# EAGLE board SparkFun_Qwiic_6DoF_BMI270-Panel (EAGLE 9.6.2), part 1 of 4
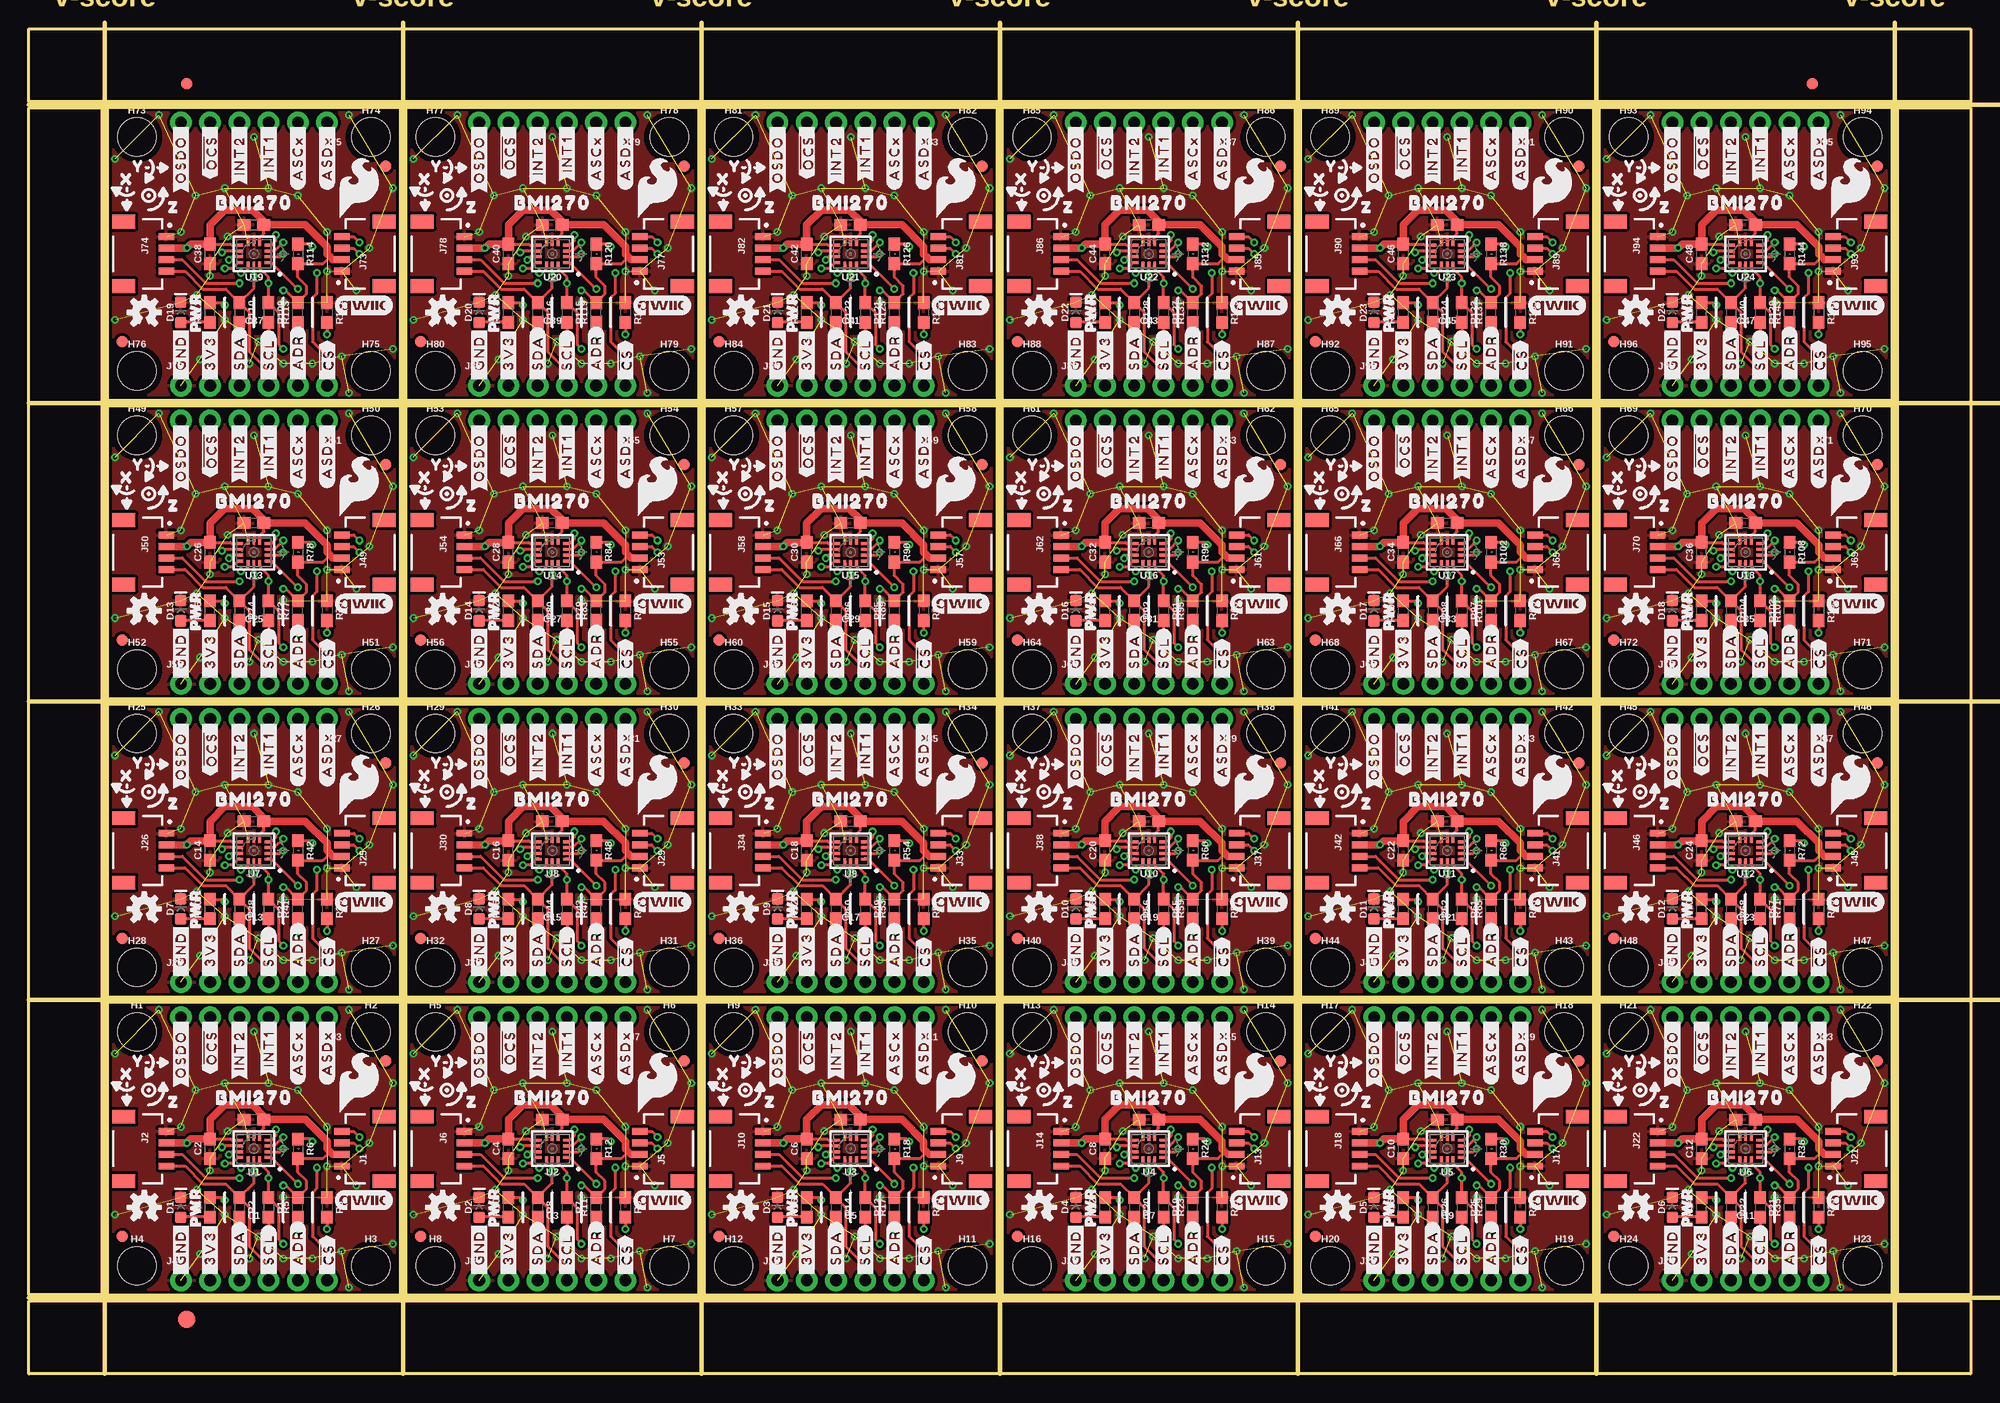
[diagram p0: board, top side]
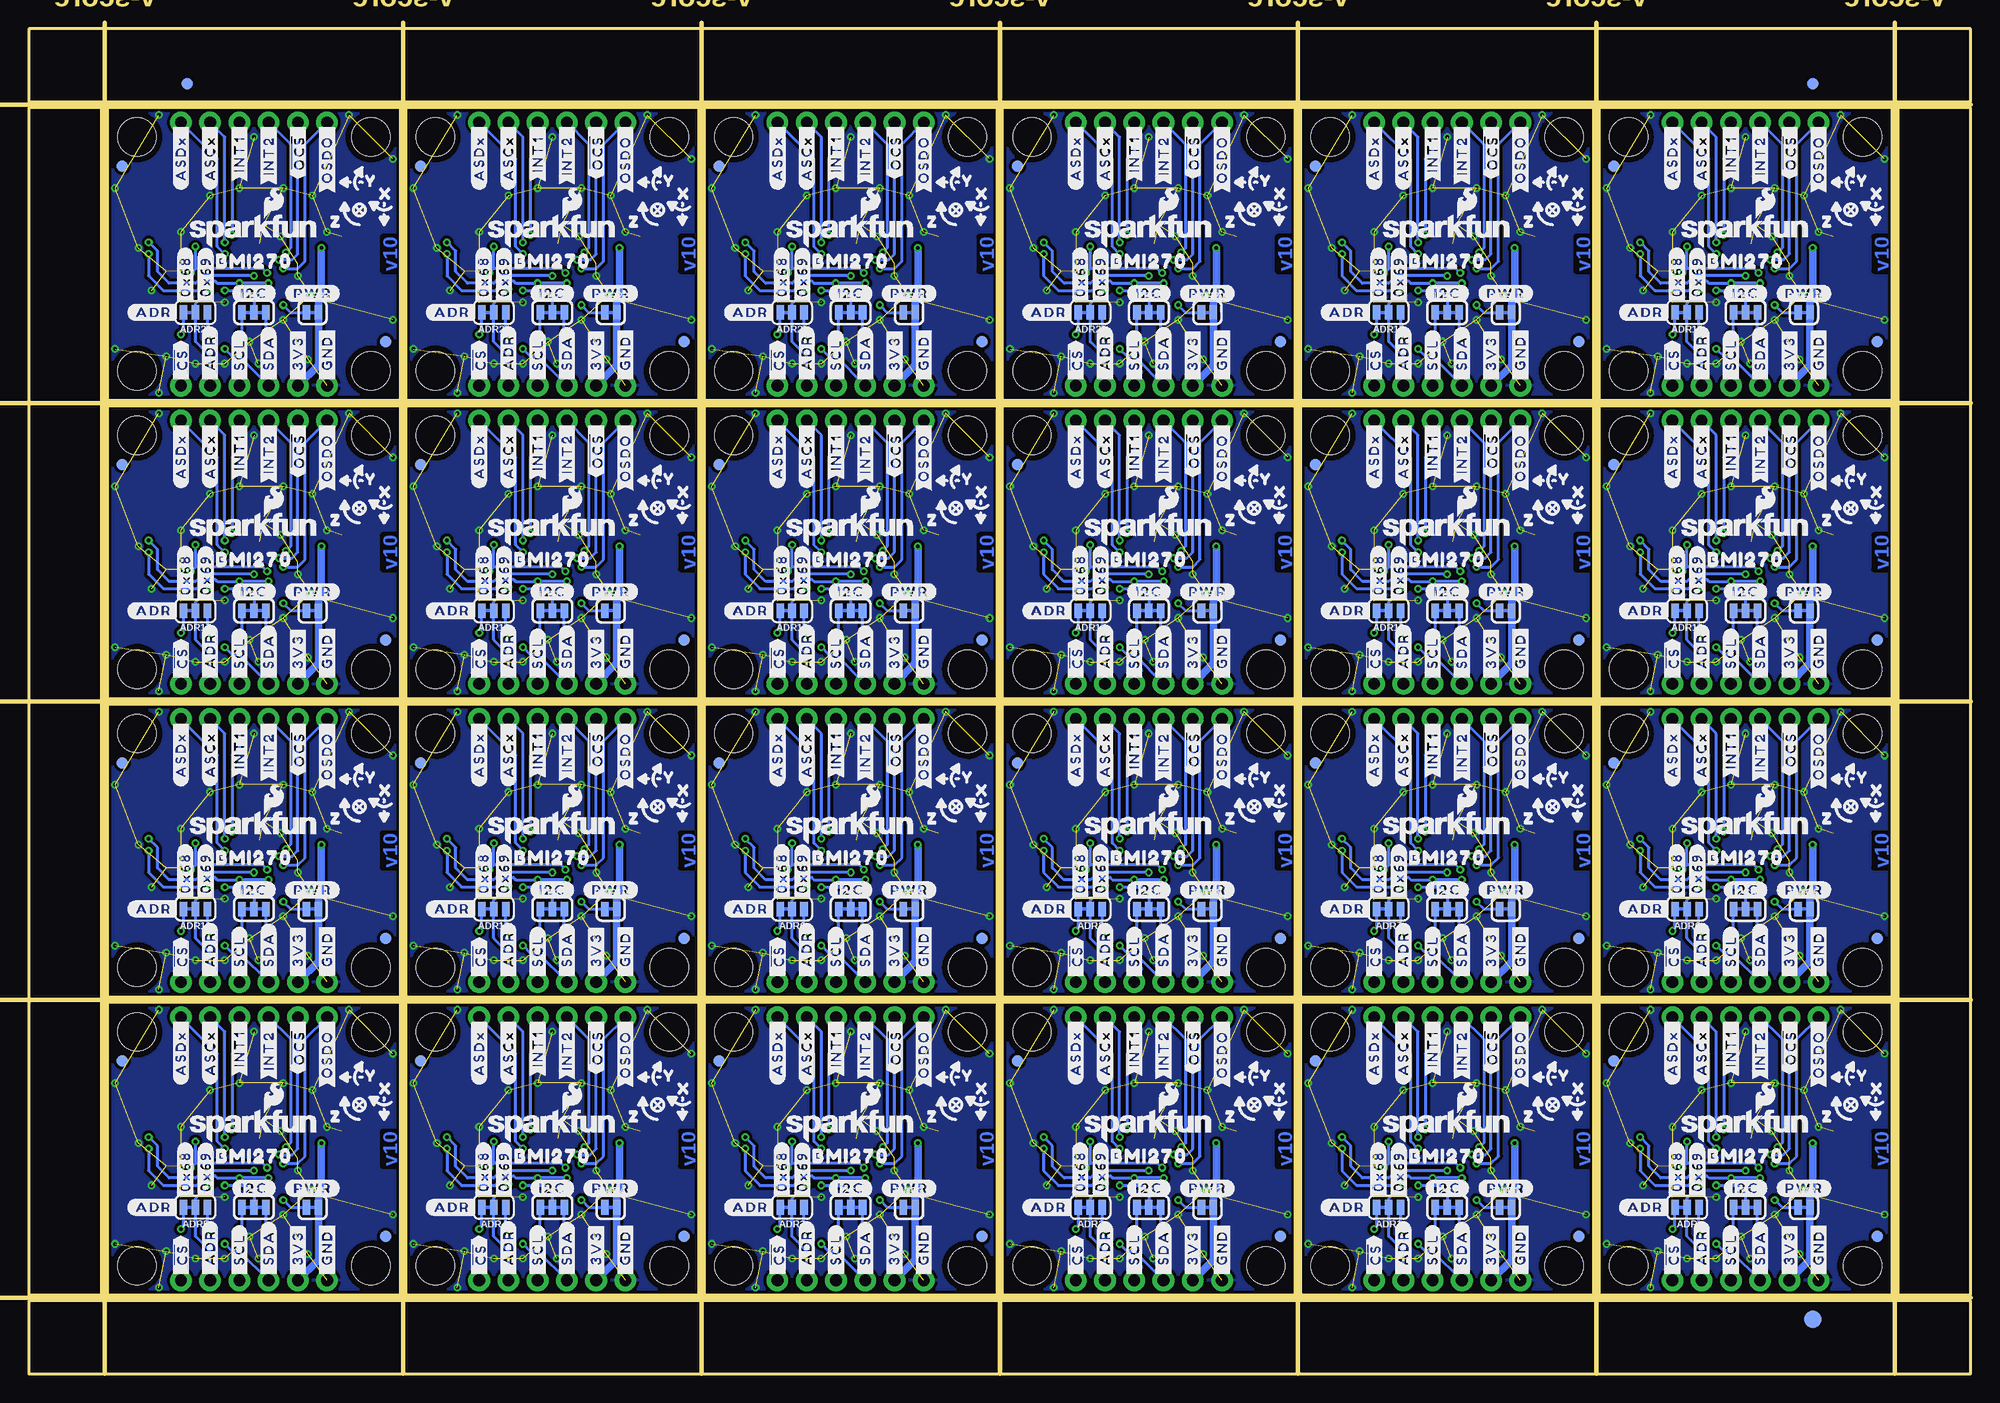
[diagram p1: board, bottom side, seen from below]

Size 168.66 x 116.84 mm. Coordinates in mm from the lower left corner, seen from the top.
Outline: 6.86,6.86 32.26,6.86 32.26,32.26 6.86,32.26 6.86,6.86
Outline: 32.77,6.86 58.17,6.86 58.17,32.26 32.77,32.26 32.77,6.86
Outline: 58.67,6.86 84.07,6.86 84.07,32.26 58.67,32.26 58.67,6.86
Outline: 84.58,6.86 109.98,6.86 109.98,32.26 84.58,32.26 84.58,6.86
Outline: 110.49,6.86 135.89,6.86 135.89,32.26 110.49,32.26 110.49,6.86
Outline: 136.4,6.86 161.8,6.86 161.8,32.26 136.4,32.26 136.4,6.86
Outline: 6.86,32.77 32.26,32.77 32.26,58.17 6.86,58.17 6.86,32.77
Outline: 32.77,32.77 58.17,32.77 58.17,58.17 32.77,58.17 32.77,32.77
Outline: 58.67,32.77 84.07,32.77 84.07,58.17 58.67,58.17 58.67,32.77
Outline: 84.58,32.77 109.98,32.77 109.98,58.17 84.58,58.17 84.58,32.77
Outline: 110.49,32.77 135.89,32.77 135.89,58.17 110.49,58.17 110.49,32.77
Outline: 136.4,32.77 161.8,32.77 161.8,58.17 136.4,58.17 136.4,32.77
Outline: 6.86,58.67 32.26,58.67 32.26,84.07 6.86,84.07 6.86,58.67
Outline: 32.77,58.67 58.17,58.67 58.17,84.07 32.77,84.07 32.77,58.67
Outline: 58.67,58.67 84.07,58.67 84.07,84.07 58.67,84.07 58.67,58.67
Outline: 84.58,58.67 109.98,58.67 109.98,84.07 84.58,84.07 84.58,58.67
Outline: 110.49,58.67 135.89,58.67 135.89,84.07 110.49,84.07 110.49,58.67
Outline: 136.4,58.67 161.8,58.67 161.8,84.07 136.4,84.07 136.4,58.67
Outline: 6.86,84.58 32.26,84.58 32.26,109.98 6.86,109.98 6.86,84.58
Outline: 32.77,84.58 58.17,84.58 58.17,109.98 32.77,109.98 32.77,84.58
Outline: 58.67,84.58 84.07,84.58 84.07,109.98 58.67,109.98 58.67,84.58
Outline: 84.58,84.58 109.98,84.58 109.98,109.98 84.58,109.98 84.58,84.58
Outline: 110.49,84.58 135.89,84.58 135.89,109.98 110.49,109.98 110.49,84.58
Outline: 136.4,84.58 161.8,84.58 161.8,109.98 136.4,109.98 136.4,84.58
Outline: 0,6.35 168.66,6.35 168.66,0 0,0 0,6.35
Outline: 162.31,109.98 168.66,109.98 168.66,6.86 162.31,6.86 162.31,109.98
Outline: 0,116.84 168.66,116.84 168.66,110.49 0,110.49 0,116.84
Outline: 0,109.98 6.35,109.98 6.35,6.86 0,6.86 0,109.98
Copper layers (1*16): Top 0.035mm / dielectric 1.5mm / Bottom 0.035mm
Design rules "SparkFun_Qwiic_6DoF_BMI270": minimum track width 7mil, minimum drill 0.3mm, track to track 7mil, track to pad 7mil, pad to pad 7mil, via to via 7mil, smd to smd 7mil, copper to edge 7mil, drill to drill 7mil, minimum pad ring 7mil, minimum via ring 7mil, stop-mask expansion 3mil, vias tented up to drill 25mil, thermal gap 10mil
tRestrict: area 19.2,20.3 to 19.4,20.6; area 19.7,12.8 to 20.1,13.1; area 45.1,20.3 to 45.3,20.6; area 45.6,12.8 to 46,13.1; area 71.1,20.3 to 71.2,20.6; area 71.5,12.8 to 71.9,13.1; area 97,20.3 to 97.1,20.6; area 97.4,12.8 to 97.8,13.1; area 122.9,20.3 to 123,20.6; area 123.3,12.8 to 123.7,13.1; area 148.8,20.3 to 148.9,20.6; area 149.2,12.8 to 149.6,13.1; area 19.2,46.2 to 19.4,46.5; area 19.7,38.7 to 20.1,39; area 45.1,46.2 to 45.3,46.5; area 45.6,38.7 to 46,39; area 71.1,46.2 to 71.2,46.5; area 71.5,38.7 to 71.9,39; area 97,46.2 to 97.1,46.5; area 97.4,38.7 to 97.8,39; area 122.9,46.2 to 123,46.5; area 123.3,38.7 to 123.7,39; area 148.8,46.2 to 148.9,46.5; area 149.2,38.7 to 149.6,39; area 19.2,72.1 to 19.4,72.4; area 19.7,64.6 to 20.1,64.9; area 45.1,72.1 to 45.3,72.4; area 45.6,64.6 to 46,64.9; area 71.1,72.1 to 71.2,72.4; area 71.5,64.6 to 71.9,64.9; area 97,72.1 to 97.1,72.4; area 97.4,64.6 to 97.8,64.9; area 122.9,72.1 to 123,72.4; area 123.3,64.6 to 123.7,64.9; area 148.8,72.1 to 148.9,72.4; area 149.2,64.6 to 149.6,64.9; area 19.2,98 to 19.4,98.3; area 19.7,90.6 to 20.1,90.8; area 45.1,98 to 45.3,98.3; area 45.6,90.6 to 46,90.8; area 71.1,98 to 71.2,98.3; area 71.5,90.6 to 71.9,90.8; area 97,98 to 97.1,98.3; area 97.4,90.6 to 97.8,90.8; area 122.9,98 to 123,98.3; area 123.3,90.6 to 123.7,90.8; area 148.8,98 to 148.9,98.3; area 149.2,90.6 to 149.6,90.8
Milling: 12 lines

## Footprints (pad centres in the part's own frame; a part is rotated, then mirrored left to right if it is on the bottom)
SMT-JUMPER_3_1-NC_TRACE_SILK = smd 0.66 x 1.27: 1 -1.041,0; 2 0,0; 3 1.041,0
0603 = smd 1.1 x 1: 1 -0.85,0; 2 0.85,0
LED-0603 = smd 1 x 1: A -0.877,0; C 0.877,0
FIDUCIAL-1X2 = smd 1 x 1: 1 0,0
FIDUCIAL-1.5X3 = smd 1.5 x 1.5: 1 0,0
STAND-OFF = hole 3.302: 0,0
SMT-JUMPER_3_2-NC_TRACE_SILK = smd 0.66 x 1.27: 1 -1.041,0; 2 0,0; 3 1.041,0
JST04_1MM_RA = smd 0.6 x 1.35: 1 -1.5,0; 2 -0.5,0; 3 0.5,0; 4 1.5,0 | smd 1.2 x 2: NC1 2.8,-3.675; NC2 -2.8,-3.675
1X06_NO_SILK = drill 1.016 pad 1.88: 1 0,0; 2 2.54,0; 3 5.08,0; 4 7.62,0; 5 10.16,0; 6 12.7,0
SMT-JUMPER_2_NC_TRACE_SILK = smd 0.66 x 1.27: 1 -0.521,0; 2 0.521,0
BMI270 = smd 0.475 x 0.25: 1 -1.163,0.75; 2 -1.163,0.25; 3 -1.163,-0.25; 4 -1.163,-0.75; 8 1.163,-0.75; 9 1.163,-0.25; 10 1.163,0.25; 11 1.163,0.75 | smd 0.25 x 0.475: 5 -0.5,-0.912; 6 0,-0.912; 7 0.5,-0.912; 12 0.5,0.912; 13 0,0.912; 14 -0.5,0.912

## Placement (x,y rotation side)
ADR  JUMPER-SMT_3_1-NC_TRACE_SILK  [SMT-JUMPER_3_1-NC_TRACE_SILK]  24.64,14.48 180 bottom
ADR1  JUMPER-SMT_3_1-NC_TRACE_SILK  [SMT-JUMPER_3_1-NC_TRACE_SILK]  50.55,14.48 180 bottom
ADR2  JUMPER-SMT_3_1-NC_TRACE_SILK  [SMT-JUMPER_3_1-NC_TRACE_SILK]  76.45,14.48 180 bottom
ADR3  JUMPER-SMT_3_1-NC_TRACE_SILK  [SMT-JUMPER_3_1-NC_TRACE_SILK]  102.36,14.48 180 bottom
ADR4  JUMPER-SMT_3_1-NC_TRACE_SILK  [SMT-JUMPER_3_1-NC_TRACE_SILK]  128.27,14.48 180 bottom
ADR5  JUMPER-SMT_3_1-NC_TRACE_SILK  [SMT-JUMPER_3_1-NC_TRACE_SILK]  154.18,14.48 180 bottom
ADR6  JUMPER-SMT_3_1-NC_TRACE_SILK  [SMT-JUMPER_3_1-NC_TRACE_SILK]  24.64,40.39 180 bottom
ADR7  JUMPER-SMT_3_1-NC_TRACE_SILK  [SMT-JUMPER_3_1-NC_TRACE_SILK]  50.55,40.39 180 bottom
ADR8  JUMPER-SMT_3_1-NC_TRACE_SILK  [SMT-JUMPER_3_1-NC_TRACE_SILK]  76.45,40.39 180 bottom
ADR9  JUMPER-SMT_3_1-NC_TRACE_SILK  [SMT-JUMPER_3_1-NC_TRACE_SILK]  102.36,40.39 180 bottom
ADR10  JUMPER-SMT_3_1-NC_TRACE_SILK  [SMT-JUMPER_3_1-NC_TRACE_SILK]  128.27,40.39 180 bottom
ADR11  JUMPER-SMT_3_1-NC_TRACE_SILK  [SMT-JUMPER_3_1-NC_TRACE_SILK]  154.18,40.39 180 bottom
ADR12  JUMPER-SMT_3_1-NC_TRACE_SILK  [SMT-JUMPER_3_1-NC_TRACE_SILK]  24.64,66.29 180 bottom
ADR13  JUMPER-SMT_3_1-NC_TRACE_SILK  [SMT-JUMPER_3_1-NC_TRACE_SILK]  50.55,66.29 180 bottom
ADR14  JUMPER-SMT_3_1-NC_TRACE_SILK  [SMT-JUMPER_3_1-NC_TRACE_SILK]  76.45,66.29 180 bottom
ADR15  JUMPER-SMT_3_1-NC_TRACE_SILK  [SMT-JUMPER_3_1-NC_TRACE_SILK]  102.36,66.29 180 bottom
ADR16  JUMPER-SMT_3_1-NC_TRACE_SILK  [SMT-JUMPER_3_1-NC_TRACE_SILK]  128.27,66.29 180 bottom
ADR17  JUMPER-SMT_3_1-NC_TRACE_SILK  [SMT-JUMPER_3_1-NC_TRACE_SILK]  154.18,66.29 180 bottom
ADR18  JUMPER-SMT_3_1-NC_TRACE_SILK  [SMT-JUMPER_3_1-NC_TRACE_SILK]  24.64,92.2 180 bottom
ADR19  JUMPER-SMT_3_1-NC_TRACE_SILK  [SMT-JUMPER_3_1-NC_TRACE_SILK]  50.55,92.2 180 bottom
ADR20  JUMPER-SMT_3_1-NC_TRACE_SILK  [SMT-JUMPER_3_1-NC_TRACE_SILK]  76.45,92.2 180 bottom
ADR21  JUMPER-SMT_3_1-NC_TRACE_SILK  [SMT-JUMPER_3_1-NC_TRACE_SILK]  102.36,92.2 180 bottom
ADR22  JUMPER-SMT_3_1-NC_TRACE_SILK  [SMT-JUMPER_3_1-NC_TRACE_SILK]  128.27,92.2 180 bottom
ADR23  JUMPER-SMT_3_1-NC_TRACE_SILK  [SMT-JUMPER_3_1-NC_TRACE_SILK]  154.18,92.2 180 bottom
C1  0.1uF  [0603]  19.56,22.1 0 top
C2  0.1uF  [0603]  15.75,19.56 90 top
C3  0.1uF  [0603]  45.47,22.1 0 top
C4  0.1uF  [0603]  41.66,19.56 90 top
C5  0.1uF  [0603]  71.37,22.1 0 top
C6  0.1uF  [0603]  67.56,19.56 90 top
C7  0.1uF  [0603]  97.28,22.1 0 top
C8  0.1uF  [0603]  93.47,19.56 90 top
C9  0.1uF  [0603]  123.19,22.1 0 top
C10  0.1uF  [0603]  119.38,19.56 90 top
C11  0.1uF  [0603]  149.1,22.1 0 top
C12  0.1uF  [0603]  145.29,19.56 90 top
C13  0.1uF  [0603]  19.56,48.01 0 top
C14  0.1uF  [0603]  15.75,45.47 90 top
C15  0.1uF  [0603]  45.47,48.01 0 top
C16  0.1uF  [0603]  41.66,45.47 90 top
C17  0.1uF  [0603]  71.37,48.01 0 top
C18  0.1uF  [0603]  67.56,45.47 90 top
C19  0.1uF  [0603]  97.28,48.01 0 top
C20  0.1uF  [0603]  93.47,45.47 90 top
C21  0.1uF  [0603]  123.19,48.01 0 top
C22  0.1uF  [0603]  119.38,45.47 90 top
C23  0.1uF  [0603]  149.1,48.01 0 top
C24  0.1uF  [0603]  145.29,45.47 90 top
C25  0.1uF  [0603]  19.56,73.91 0 top
C26  0.1uF  [0603]  15.75,71.37 90 top
C27  0.1uF  [0603]  45.47,73.91 0 top
C28  0.1uF  [0603]  41.66,71.37 90 top
C29  0.1uF  [0603]  71.37,73.91 0 top
C30  0.1uF  [0603]  67.56,71.37 90 top
C31  0.1uF  [0603]  97.28,73.91 0 top
C32  0.1uF  [0603]  93.47,71.37 90 top
C33  0.1uF  [0603]  123.19,73.91 0 top
C34  0.1uF  [0603]  119.38,71.37 90 top
C35  0.1uF  [0603]  149.1,73.91 0 top
C36  0.1uF  [0603]  145.29,71.37 90 top
C37  0.1uF  [0603]  19.56,99.82 0 top
C38  0.1uF  [0603]  15.75,97.28 90 top
C39  0.1uF  [0603]  45.47,99.82 0 top
C40  0.1uF  [0603]  41.66,97.28 90 top
C41  0.1uF  [0603]  71.37,99.82 0 top
C42  0.1uF  [0603]  67.56,97.28 90 top
C43  0.1uF  [0603]  97.28,99.82 0 top
C44  0.1uF  [0603]  93.47,97.28 90 top
C45  0.1uF  [0603]  123.19,99.82 0 top
C46  0.1uF  [0603]  119.38,97.28 90 top
C47  0.1uF  [0603]  149.1,99.82 0 top
C48  0.1uF  [0603]  145.29,97.28 90 top
D1  RED  [LED-0603]  13.21,14.48 90 top
D2  RED  [LED-0603]  39.12,14.48 90 top
D3  RED  [LED-0603]  65.02,14.48 90 top
D4  RED  [LED-0603]  90.93,14.48 90 top
D5  RED  [LED-0603]  116.84,14.48 90 top
D6  RED  [LED-0603]  142.75,14.48 90 top
D7  RED  [LED-0603]  13.21,40.39 90 top
D8  RED  [LED-0603]  39.12,40.39 90 top
D9  RED  [LED-0603]  65.02,40.39 90 top
D10  RED  [LED-0603]  90.93,40.39 90 top
D11  RED  [LED-0603]  116.84,40.39 90 top
D12  RED  [LED-0603]  142.75,40.39 90 top
D13  RED  [LED-0603]  13.21,66.29 90 top
D14  RED  [LED-0603]  39.12,66.29 90 top
D15  RED  [LED-0603]  65.02,66.29 90 top
D16  RED  [LED-0603]  90.93,66.29 90 top
D17  RED  [LED-0603]  116.84,66.29 90 top
D18  RED  [LED-0603]  142.75,66.29 90 top
D19  RED  [LED-0603]  13.21,92.2 90 top
D20  RED  [LED-0603]  39.12,92.2 90 top
D21  RED  [LED-0603]  65.02,92.2 90 top
D22  RED  [LED-0603]  90.93,92.2 90 top
D23  RED  [LED-0603]  116.84,92.2 90 top
D24  RED  [LED-0603]  142.75,92.2 90 top
E$1  [FIDUCIAL-1X2]  13.72,112.08 0 top
E$2  [FIDUCIAL-1X2]  13.72,112.08 0 bottom
E$3  [FIDUCIAL-1X2]  154.88,112.08 0 top
E$4  [FIDUCIAL-1X2]  154.88,112.08 0 bottom
E$5  [FIDUCIAL-1.5X3]  13.72,4.76 0 top
E$6  [FIDUCIAL-1.5X3]  13.72,4.76 0 bottom
FD1  FIDUCIAL1X2  [FIDUCIAL-1X2]  8.13,11.94 0 top
FD2  FIDUCIAL1X2  [FIDUCIAL-1X2]  30.99,27.18 0 top
FD3  FIDUCIAL1X2  [FIDUCIAL-1X2]  30.99,27.18 0 bottom
FD4  FIDUCIAL1X2  [FIDUCIAL-1X2]  8.13,11.94 0 bottom
FD5  FIDUCIAL1X2  [FIDUCIAL-1X2]  34.04,11.94 0 top
FD6  FIDUCIAL1X2  [FIDUCIAL-1X2]  56.9,27.18 0 top
FD7  FIDUCIAL1X2  [FIDUCIAL-1X2]  56.9,27.18 0 bottom
FD8  FIDUCIAL1X2  [FIDUCIAL-1X2]  34.04,11.94 0 bottom
FD9  FIDUCIAL1X2  [FIDUCIAL-1X2]  59.94,11.94 0 top
FD10  FIDUCIAL1X2  [FIDUCIAL-1X2]  82.8,27.18 0 top
FD11  FIDUCIAL1X2  [FIDUCIAL-1X2]  82.8,27.18 0 bottom
FD12  FIDUCIAL1X2  [FIDUCIAL-1X2]  59.94,11.94 0 bottom
FD13  FIDUCIAL1X2  [FIDUCIAL-1X2]  85.85,11.94 0 top
FD14  FIDUCIAL1X2  [FIDUCIAL-1X2]  108.71,27.18 0 top
FD15  FIDUCIAL1X2  [FIDUCIAL-1X2]  108.71,27.18 0 bottom
FD16  FIDUCIAL1X2  [FIDUCIAL-1X2]  85.85,11.94 0 bottom
FD17  FIDUCIAL1X2  [FIDUCIAL-1X2]  111.76,11.94 0 top
FD18  FIDUCIAL1X2  [FIDUCIAL-1X2]  134.62,27.18 0 top
FD19  FIDUCIAL1X2  [FIDUCIAL-1X2]  134.62,27.18 0 bottom
FD20  FIDUCIAL1X2  [FIDUCIAL-1X2]  111.76,11.94 0 bottom
FD21  FIDUCIAL1X2  [FIDUCIAL-1X2]  137.67,11.94 0 top
FD22  FIDUCIAL1X2  [FIDUCIAL-1X2]  160.53,27.18 0 top
FD23  FIDUCIAL1X2  [FIDUCIAL-1X2]  160.53,27.18 0 bottom
FD24  FIDUCIAL1X2  [FIDUCIAL-1X2]  137.67,11.94 0 bottom
FD25  FIDUCIAL1X2  [FIDUCIAL-1X2]  8.13,37.85 0 top
FD26  FIDUCIAL1X2  [FIDUCIAL-1X2]  30.99,53.09 0 top
FD27  FIDUCIAL1X2  [FIDUCIAL-1X2]  30.99,53.09 0 bottom
FD28  FIDUCIAL1X2  [FIDUCIAL-1X2]  8.13,37.85 0 bottom
FD29  FIDUCIAL1X2  [FIDUCIAL-1X2]  34.04,37.85 0 top
FD30  FIDUCIAL1X2  [FIDUCIAL-1X2]  56.9,53.09 0 top
FD31  FIDUCIAL1X2  [FIDUCIAL-1X2]  56.9,53.09 0 bottom
FD32  FIDUCIAL1X2  [FIDUCIAL-1X2]  34.04,37.85 0 bottom
FD33  FIDUCIAL1X2  [FIDUCIAL-1X2]  59.94,37.85 0 top
FD34  FIDUCIAL1X2  [FIDUCIAL-1X2]  82.8,53.09 0 top
FD35  FIDUCIAL1X2  [FIDUCIAL-1X2]  82.8,53.09 0 bottom
FD36  FIDUCIAL1X2  [FIDUCIAL-1X2]  59.94,37.85 0 bottom
FD37  FIDUCIAL1X2  [FIDUCIAL-1X2]  85.85,37.85 0 top
FD38  FIDUCIAL1X2  [FIDUCIAL-1X2]  108.71,53.09 0 top
FD39  FIDUCIAL1X2  [FIDUCIAL-1X2]  108.71,53.09 0 bottom
FD40  FIDUCIAL1X2  [FIDUCIAL-1X2]  85.85,37.85 0 bottom
FD41  FIDUCIAL1X2  [FIDUCIAL-1X2]  111.76,37.85 0 top
FD42  FIDUCIAL1X2  [FIDUCIAL-1X2]  134.62,53.09 0 top
FD43  FIDUCIAL1X2  [FIDUCIAL-1X2]  134.62,53.09 0 bottom
FD44  FIDUCIAL1X2  [FIDUCIAL-1X2]  111.76,37.85 0 bottom
FD45  FIDUCIAL1X2  [FIDUCIAL-1X2]  137.67,37.85 0 top
FD46  FIDUCIAL1X2  [FIDUCIAL-1X2]  160.53,53.09 0 top
FD47  FIDUCIAL1X2  [FIDUCIAL-1X2]  160.53,53.09 0 bottom
FD48  FIDUCIAL1X2  [FIDUCIAL-1X2]  137.67,37.85 0 bottom
FD49  FIDUCIAL1X2  [FIDUCIAL-1X2]  8.13,63.75 0 top
FD50  FIDUCIAL1X2  [FIDUCIAL-1X2]  30.99,78.99 0 top
FD51  FIDUCIAL1X2  [FIDUCIAL-1X2]  30.99,78.99 0 bottom
FD52  FIDUCIAL1X2  [FIDUCIAL-1X2]  8.13,63.75 0 bottom
FD53  FIDUCIAL1X2  [FIDUCIAL-1X2]  34.04,63.75 0 top
FD54  FIDUCIAL1X2  [FIDUCIAL-1X2]  56.9,78.99 0 top
FD55  FIDUCIAL1X2  [FIDUCIAL-1X2]  56.9,78.99 0 bottom
FD56  FIDUCIAL1X2  [FIDUCIAL-1X2]  34.04,63.75 0 bottom
FD57  FIDUCIAL1X2  [FIDUCIAL-1X2]  59.94,63.75 0 top
FD58  FIDUCIAL1X2  [FIDUCIAL-1X2]  82.8,78.99 0 top
FD59  FIDUCIAL1X2  [FIDUCIAL-1X2]  82.8,78.99 0 bottom
FD60  FIDUCIAL1X2  [FIDUCIAL-1X2]  59.94,63.75 0 bottom
FD61  FIDUCIAL1X2  [FIDUCIAL-1X2]  85.85,63.75 0 top
FD62  FIDUCIAL1X2  [FIDUCIAL-1X2]  108.71,78.99 0 top
FD63  FIDUCIAL1X2  [FIDUCIAL-1X2]  108.71,78.99 0 bottom
FD64  FIDUCIAL1X2  [FIDUCIAL-1X2]  85.85,63.75 0 bottom
FD65  FIDUCIAL1X2  [FIDUCIAL-1X2]  111.76,63.75 0 top
FD66  FIDUCIAL1X2  [FIDUCIAL-1X2]  134.62,78.99 0 top
FD67  FIDUCIAL1X2  [FIDUCIAL-1X2]  134.62,78.99 0 bottom
FD68  FIDUCIAL1X2  [FIDUCIAL-1X2]  111.76,63.75 0 bottom
FD69  FIDUCIAL1X2  [FIDUCIAL-1X2]  137.67,63.75 0 top
FD70  FIDUCIAL1X2  [FIDUCIAL-1X2]  160.53,78.99 0 top
FD71  FIDUCIAL1X2  [FIDUCIAL-1X2]  160.53,78.99 0 bottom
FD72  FIDUCIAL1X2  [FIDUCIAL-1X2]  137.67,63.75 0 bottom
FD73  FIDUCIAL1X2  [FIDUCIAL-1X2]  8.13,89.66 0 top
FD74  FIDUCIAL1X2  [FIDUCIAL-1X2]  30.99,104.9 0 top
FD75  FIDUCIAL1X2  [FIDUCIAL-1X2]  30.99,104.9 0 bottom
FD76  FIDUCIAL1X2  [FIDUCIAL-1X2]  8.13,89.66 0 bottom
FD77  FIDUCIAL1X2  [FIDUCIAL-1X2]  34.04,89.66 0 top
FD78  FIDUCIAL1X2  [FIDUCIAL-1X2]  56.9,104.9 0 top
FD79  FIDUCIAL1X2  [FIDUCIAL-1X2]  56.9,104.9 0 bottom
FD80  FIDUCIAL1X2  [FIDUCIAL-1X2]  34.04,89.66 0 bottom
FD81  FIDUCIAL1X2  [FIDUCIAL-1X2]  59.94,89.66 0 top
FD82  FIDUCIAL1X2  [FIDUCIAL-1X2]  82.8,104.9 0 top
FD83  FIDUCIAL1X2  [FIDUCIAL-1X2]  82.8,104.9 0 bottom
FD84  FIDUCIAL1X2  [FIDUCIAL-1X2]  59.94,89.66 0 bottom
FD85  FIDUCIAL1X2  [FIDUCIAL-1X2]  85.85,89.66 0 top
FD86  FIDUCIAL1X2  [FIDUCIAL-1X2]  108.71,104.9 0 top
FD87  FIDUCIAL1X2  [FIDUCIAL-1X2]  108.71,104.9 0 bottom
FD88  FIDUCIAL1X2  [FIDUCIAL-1X2]  85.85,89.66 0 bottom
FD89  FIDUCIAL1X2  [FIDUCIAL-1X2]  111.76,89.66 0 top
FD90  FIDUCIAL1X2  [FIDUCIAL-1X2]  134.62,104.9 0 top
FD91  FIDUCIAL1X2  [FIDUCIAL-1X2]  134.62,104.9 0 bottom
FD92  FIDUCIAL1X2  [FIDUCIAL-1X2]  111.76,89.66 0 bottom
FD93  FIDUCIAL1X2  [FIDUCIAL-1X2]  137.67,89.66 0 top
FD94  FIDUCIAL1X2  [FIDUCIAL-1X2]  160.53,104.9 0 top
FD95  FIDUCIAL1X2  [FIDUCIAL-1X2]  160.53,104.9 0 bottom
FD96  FIDUCIAL1X2  [FIDUCIAL-1X2]  137.67,89.66 0 bottom
H1  STAND-OFF  [STAND-OFF]  9.4,29.72 0 top
H2  STAND-OFF  [STAND-OFF]  29.72,29.72 0 top
H3  STAND-OFF  [STAND-OFF]  29.72,9.4 0 top
H4  STAND-OFF  [STAND-OFF]  9.4,9.4 0 top
H5  STAND-OFF  [STAND-OFF]  35.31,29.72 0 top
H6  STAND-OFF  [STAND-OFF]  55.63,29.72 0 top
H7  STAND-OFF  [STAND-OFF]  55.63,9.4 0 top
H8  STAND-OFF  [STAND-OFF]  35.31,9.4 0 top
H9  STAND-OFF  [STAND-OFF]  61.21,29.72 0 top
H10  STAND-OFF  [STAND-OFF]  81.53,29.72 0 top
H11  STAND-OFF  [STAND-OFF]  81.53,9.4 0 top
H12  STAND-OFF  [STAND-OFF]  61.21,9.4 0 top
H13  STAND-OFF  [STAND-OFF]  87.12,29.72 0 top
H14  STAND-OFF  [STAND-OFF]  107.44,29.72 0 top
H15  STAND-OFF  [STAND-OFF]  107.44,9.4 0 top
H16  STAND-OFF  [STAND-OFF]  87.12,9.4 0 top
H17  STAND-OFF  [STAND-OFF]  113.03,29.72 0 top
H18  STAND-OFF  [STAND-OFF]  133.35,29.72 0 top
H19  STAND-OFF  [STAND-OFF]  133.35,9.4 0 top
H20  STAND-OFF  [STAND-OFF]  113.03,9.4 0 top
H21  STAND-OFF  [STAND-OFF]  138.94,29.72 0 top
H22  STAND-OFF  [STAND-OFF]  159.26,29.72 0 top
H23  STAND-OFF  [STAND-OFF]  159.26,9.4 0 top
H24  STAND-OFF  [STAND-OFF]  138.94,9.4 0 top
H25  STAND-OFF  [STAND-OFF]  9.4,55.63 0 top
H26  STAND-OFF  [STAND-OFF]  29.72,55.63 0 top
H27  STAND-OFF  [STAND-OFF]  29.72,35.31 0 top
H28  STAND-OFF  [STAND-OFF]  9.4,35.31 0 top
H29  STAND-OFF  [STAND-OFF]  35.31,55.63 0 top
H30  STAND-OFF  [STAND-OFF]  55.63,55.63 0 top
H31  STAND-OFF  [STAND-OFF]  55.63,35.31 0 top
H32  STAND-OFF  [STAND-OFF]  35.31,35.31 0 top
H33  STAND-OFF  [STAND-OFF]  61.21,55.63 0 top
H34  STAND-OFF  [STAND-OFF]  81.53,55.63 0 top
H35  STAND-OFF  [STAND-OFF]  81.53,35.31 0 top
H36  STAND-OFF  [STAND-OFF]  61.21,35.31 0 top
H37  STAND-OFF  [STAND-OFF]  87.12,55.63 0 top
H38  STAND-OFF  [STAND-OFF]  107.44,55.63 0 top
H39  STAND-OFF  [STAND-OFF]  107.44,35.31 0 top
H40  STAND-OFF  [STAND-OFF]  87.12,35.31 0 top
H41  STAND-OFF  [STAND-OFF]  113.03,55.63 0 top
H42  STAND-OFF  [STAND-OFF]  133.35,55.63 0 top
H43  STAND-OFF  [STAND-OFF]  133.35,35.31 0 top
H44  STAND-OFF  [STAND-OFF]  113.03,35.31 0 top
H45  STAND-OFF  [STAND-OFF]  138.94,55.63 0 top
H46  STAND-OFF  [STAND-OFF]  159.26,55.63 0 top
H47  STAND-OFF  [STAND-OFF]  159.26,35.31 0 top
H48  STAND-OFF  [STAND-OFF]  138.94,35.31 0 top
H49  STAND-OFF  [STAND-OFF]  9.4,81.53 0 top
H50  STAND-OFF  [STAND-OFF]  29.72,81.53 0 top
H51  STAND-OFF  [STAND-OFF]  29.72,61.21 0 top
H52  STAND-OFF  [STAND-OFF]  9.4,61.21 0 top
H53  STAND-OFF  [STAND-OFF]  35.31,81.53 0 top
H54  STAND-OFF  [STAND-OFF]  55.63,81.53 0 top
H55  STAND-OFF  [STAND-OFF]  55.63,61.21 0 top
H56  STAND-OFF  [STAND-OFF]  35.31,61.21 0 top
H57  STAND-OFF  [STAND-OFF]  61.21,81.53 0 top
H58  STAND-OFF  [STAND-OFF]  81.53,81.53 0 top
H59  STAND-OFF  [STAND-OFF]  81.53,61.21 0 top
H60  STAND-OFF  [STAND-OFF]  61.21,61.21 0 top
H61  STAND-OFF  [STAND-OFF]  87.12,81.53 0 top
H62  STAND-OFF  [STAND-OFF]  107.44,81.53 0 top
H63  STAND-OFF  [STAND-OFF]  107.44,61.21 0 top
H64  STAND-OFF  [STAND-OFF]  87.12,61.21 0 top
H65  STAND-OFF  [STAND-OFF]  113.03,81.53 0 top
H66  STAND-OFF  [STAND-OFF]  133.35,81.53 0 top
H67  STAND-OFF  [STAND-OFF]  133.35,61.21 0 top
H68  STAND-OFF  [STAND-OFF]  113.03,61.21 0 top
H69  STAND-OFF  [STAND-OFF]  138.94,81.53 0 top
H70  STAND-OFF  [STAND-OFF]  159.26,81.53 0 top
H71  STAND-OFF  [STAND-OFF]  159.26,61.21 0 top
H72  STAND-OFF  [STAND-OFF]  138.94,61.21 0 top
H73  STAND-OFF  [STAND-OFF]  9.4,107.44 0 top
H74  STAND-OFF  [STAND-OFF]  29.72,107.44 0 top
H75  STAND-OFF  [STAND-OFF]  29.72,87.12 0 top
H76  STAND-OFF  [STAND-OFF]  9.4,87.12 0 top
H77  STAND-OFF  [STAND-OFF]  35.31,107.44 0 top
H78  STAND-OFF  [STAND-OFF]  55.63,107.44 0 top
H79  STAND-OFF  [STAND-OFF]  55.63,87.12 0 top
H80  STAND-OFF  [STAND-OFF]  35.31,87.12 0 top
H81  STAND-OFF  [STAND-OFF]  61.21,107.44 0 top
H82  STAND-OFF  [STAND-OFF]  81.53,107.44 0 top
H83  STAND-OFF  [STAND-OFF]  81.53,87.12 0 top
H84  STAND-OFF  [STAND-OFF]  61.21,87.12 0 top
H85  STAND-OFF  [STAND-OFF]  87.12,107.44 0 top
H86  STAND-OFF  [STAND-OFF]  107.44,107.44 0 top
H87  STAND-OFF  [STAND-OFF]  107.44,87.12 0 top
H88  STAND-OFF  [STAND-OFF]  87.12,87.12 0 top
H89  STAND-OFF  [STAND-OFF]  113.03,107.44 0 top
H90  STAND-OFF  [STAND-OFF]  133.35,107.44 0 top
H91  STAND-OFF  [STAND-OFF]  133.35,87.12 0 top
H92  STAND-OFF  [STAND-OFF]  113.03,87.12 0 top
H93  STAND-OFF  [STAND-OFF]  138.94,107.44 0 top
H94  STAND-OFF  [STAND-OFF]  159.26,107.44 0 top
H95  STAND-OFF  [STAND-OFF]  159.26,87.12 0 top
H96  STAND-OFF  [STAND-OFF]  138.94,87.12 0 top
I2C  JUMPER-SMT_3_2-NC_TRACE_SILK  [SMT-JUMPER_3_2-NC_TRACE_SILK]  19.56,14.48 0 bottom
I2C1  JUMPER-SMT_3_2-NC_TRACE_SILK  [SMT-JUMPER_3_2-NC_TRACE_SILK]  45.47,14.48 0 bottom
I2C2  JUMPER-SMT_3_2-NC_TRACE_SILK  [SMT-JUMPER_3_2-NC_TRACE_SILK]  71.37,14.48 0 bottom
I2C3  JUMPER-SMT_3_2-NC_TRACE_SILK  [SMT-JUMPER_3_2-NC_TRACE_SILK]  97.28,14.48 0 bottom
I2C4  JUMPER-SMT_3_2-NC_TRACE_SILK  [SMT-JUMPER_3_2-NC_TRACE_SILK]  123.19,14.48 0 bottom
I2C5  JUMPER-SMT_3_2-NC_TRACE_SILK  [SMT-JUMPER_3_2-NC_TRACE_SILK]  149.1,14.48 0 bottom
I2C6  JUMPER-SMT_3_2-NC_TRACE_SILK  [SMT-JUMPER_3_2-NC_TRACE_SILK]  19.56,40.39 0 bottom
I2C7  JUMPER-SMT_3_2-NC_TRACE_SILK  [SMT-JUMPER_3_2-NC_TRACE_SILK]  45.47,40.39 0 bottom
I2C8  JUMPER-SMT_3_2-NC_TRACE_SILK  [SMT-JUMPER_3_2-NC_TRACE_SILK]  71.37,40.39 0 bottom
I2C9  JUMPER-SMT_3_2-NC_TRACE_SILK  [SMT-JUMPER_3_2-NC_TRACE_SILK]  97.28,40.39 0 bottom
I2C10  JUMPER-SMT_3_2-NC_TRACE_SILK  [SMT-JUMPER_3_2-NC_TRACE_SILK]  123.19,40.39 0 bottom
I2C11  JUMPER-SMT_3_2-NC_TRACE_SILK  [SMT-JUMPER_3_2-NC_TRACE_SILK]  149.1,40.39 0 bottom
I2C12  JUMPER-SMT_3_2-NC_TRACE_SILK  [SMT-JUMPER_3_2-NC_TRACE_SILK]  19.56,66.29 0 bottom
I2C13  JUMPER-SMT_3_2-NC_TRACE_SILK  [SMT-JUMPER_3_2-NC_TRACE_SILK]  45.47,66.29 0 bottom
I2C14  JUMPER-SMT_3_2-NC_TRACE_SILK  [SMT-JUMPER_3_2-NC_TRACE_SILK]  71.37,66.29 0 bottom
I2C15  JUMPER-SMT_3_2-NC_TRACE_SILK  [SMT-JUMPER_3_2-NC_TRACE_SILK]  97.28,66.29 0 bottom
I2C16  JUMPER-SMT_3_2-NC_TRACE_SILK  [SMT-JUMPER_3_2-NC_TRACE_SILK]  123.19,66.29 0 bottom
I2C17  JUMPER-SMT_3_2-NC_TRACE_SILK  [SMT-JUMPER_3_2-NC_TRACE_SILK]  149.1,66.29 0 bottom
I2C18  JUMPER-SMT_3_2-NC_TRACE_SILK  [SMT-JUMPER_3_2-NC_TRACE_SILK]  19.56,92.2 0 bottom
I2C19  JUMPER-SMT_3_2-NC_TRACE_SILK  [SMT-JUMPER_3_2-NC_TRACE_SILK]  45.47,92.2 0 bottom
I2C20  JUMPER-SMT_3_2-NC_TRACE_SILK  [SMT-JUMPER_3_2-NC_TRACE_SILK]  71.37,92.2 0 bottom
I2C21  JUMPER-SMT_3_2-NC_TRACE_SILK  [SMT-JUMPER_3_2-NC_TRACE_SILK]  97.28,92.2 0 bottom
I2C22  JUMPER-SMT_3_2-NC_TRACE_SILK  [SMT-JUMPER_3_2-NC_TRACE_SILK]  123.19,92.2 0 bottom
I2C23  JUMPER-SMT_3_2-NC_TRACE_SILK  [SMT-JUMPER_3_2-NC_TRACE_SILK]  149.1,92.2 0 bottom
J1  QWIIC_RIGHT_ANGLE  [JST04_1MM_RA]  27.18,19.56 90 top
J2  QWIIC_RIGHT_ANGLE  [JST04_1MM_RA]  11.94,19.56 270 top
J3  [1X06_NO_SILK]  25.91,30.99 180 top
J4  [1X06_NO_SILK]  13.21,8.13 0 top
J5  QWIIC_RIGHT_ANGLE  [JST04_1MM_RA]  53.09,19.56 90 top
J6  QWIIC_RIGHT_ANGLE  [JST04_1MM_RA]  37.85,19.56 270 top
J7  [1X06_NO_SILK]  51.82,30.99 180 top
J8  [1X06_NO_SILK]  39.12,8.13 0 top
J9  QWIIC_RIGHT_ANGLE  [JST04_1MM_RA]  78.99,19.56 90 top
J10  QWIIC_RIGHT_ANGLE  [JST04_1MM_RA]  63.75,19.56 270 top
J11  [1X06_NO_SILK]  77.72,30.99 180 top
J12  [1X06_NO_SILK]  65.02,8.13 0 top
J13  QWIIC_RIGHT_ANGLE  [JST04_1MM_RA]  104.9,19.56 90 top
J14  QWIIC_RIGHT_ANGLE  [JST04_1MM_RA]  89.66,19.56 270 top
J15  [1X06_NO_SILK]  103.63,30.99 180 top
J16  [1X06_NO_SILK]  90.93,8.13 0 top
J17  QWIIC_RIGHT_ANGLE  [JST04_1MM_RA]  130.81,19.56 90 top
J18  QWIIC_RIGHT_ANGLE  [JST04_1MM_RA]  115.57,19.56 270 top
J19  [1X06_NO_SILK]  129.54,30.99 180 top
J20  [1X06_NO_SILK]  116.84,8.13 0 top
J21  QWIIC_RIGHT_ANGLE  [JST04_1MM_RA]  156.72,19.56 90 top
J22  QWIIC_RIGHT_ANGLE  [JST04_1MM_RA]  141.48,19.56 270 top
J23  [1X06_NO_SILK]  155.45,30.99 180 top
J24  [1X06_NO_SILK]  142.75,8.13 0 top
J25  QWIIC_RIGHT_ANGLE  [JST04_1MM_RA]  27.18,45.47 90 top
J26  QWIIC_RIGHT_ANGLE  [JST04_1MM_RA]  11.94,45.47 270 top
J27  [1X06_NO_SILK]  25.91,56.9 180 top
J28  [1X06_NO_SILK]  13.21,34.04 0 top
J29  QWIIC_RIGHT_ANGLE  [JST04_1MM_RA]  53.09,45.47 90 top
J30  QWIIC_RIGHT_ANGLE  [JST04_1MM_RA]  37.85,45.47 270 top
J31  [1X06_NO_SILK]  51.82,56.9 180 top
J32  [1X06_NO_SILK]  39.12,34.04 0 top
J33  QWIIC_RIGHT_ANGLE  [JST04_1MM_RA]  78.99,45.47 90 top
J34  QWIIC_RIGHT_ANGLE  [JST04_1MM_RA]  63.75,45.47 270 top
J35  [1X06_NO_SILK]  77.72,56.9 180 top
J36  [1X06_NO_SILK]  65.02,34.04 0 top
J37  QWIIC_RIGHT_ANGLE  [JST04_1MM_RA]  104.9,45.47 90 top
J38  QWIIC_RIGHT_ANGLE  [JST04_1MM_RA]  89.66,45.47 270 top
J39  [1X06_NO_SILK]  103.63,56.9 180 top
J40  [1X06_NO_SILK]  90.93,34.04 0 top
J41  QWIIC_RIGHT_ANGLE  [JST04_1MM_RA]  130.81,45.47 90 top
J42  QWIIC_RIGHT_ANGLE  [JST04_1MM_RA]  115.57,45.47 270 top
J43  [1X06_NO_SILK]  129.54,56.9 180 top
J44  [1X06_NO_SILK]  116.84,34.04 0 top
J45  QWIIC_RIGHT_ANGLE  [JST04_1MM_RA]  156.72,45.47 90 top
J46  QWIIC_RIGHT_ANGLE  [JST04_1MM_RA]  141.48,45.47 270 top
J47  [1X06_NO_SILK]  155.45,56.9 180 top
J48  [1X06_NO_SILK]  142.75,34.04 0 top
J49  QWIIC_RIGHT_ANGLE  [JST04_1MM_RA]  27.18,71.37 90 top
J50  QWIIC_RIGHT_ANGLE  [JST04_1MM_RA]  11.94,71.37 270 top
J51  [1X06_NO_SILK]  25.91,82.8 180 top
J52  [1X06_NO_SILK]  13.21,59.94 0 top
J53  QWIIC_RIGHT_ANGLE  [JST04_1MM_RA]  53.09,71.37 90 top
J54  QWIIC_RIGHT_ANGLE  [JST04_1MM_RA]  37.85,71.37 270 top
J55  [1X06_NO_SILK]  51.82,82.8 180 top
J56  [1X06_NO_SILK]  39.12,59.94 0 top
J57  QWIIC_RIGHT_ANGLE  [JST04_1MM_RA]  78.99,71.37 90 top
J58  QWIIC_RIGHT_ANGLE  [JST04_1MM_RA]  63.75,71.37 270 top
J59  [1X06_NO_SILK]  77.72,82.8 180 top
J60  [1X06_NO_SILK]  65.02,59.94 0 top
J61  QWIIC_RIGHT_ANGLE  [JST04_1MM_RA]  104.9,71.37 90 top
J62  QWIIC_RIGHT_ANGLE  [JST04_1MM_RA]  89.66,71.37 270 top
J63  [1X06_NO_SILK]  103.63,82.8 180 top
J64  [1X06_NO_SILK]  90.93,59.94 0 top
J65  QWIIC_RIGHT_ANGLE  [JST04_1MM_RA]  130.81,71.37 90 top
J66  QWIIC_RIGHT_ANGLE  [JST04_1MM_RA]  115.57,71.37 270 top
J67  [1X06_NO_SILK]  129.54,82.8 180 top
J68  [1X06_NO_SILK]  116.84,59.94 0 top
J69  QWIIC_RIGHT_ANGLE  [JST04_1MM_RA]  156.72,71.37 90 top
J70  QWIIC_RIGHT_ANGLE  [JST04_1MM_RA]  141.48,71.37 270 top
J71  [1X06_NO_SILK]  155.45,82.8 180 top
J72  [1X06_NO_SILK]  142.75,59.94 0 top
J73  QWIIC_RIGHT_ANGLE  [JST04_1MM_RA]  27.18,97.28 90 top
J74  QWIIC_RIGHT_ANGLE  [JST04_1MM_RA]  11.94,97.28 270 top
J75  [1X06_NO_SILK]  25.91,108.71 180 top
J76  [1X06_NO_SILK]  13.21,85.85 0 top
J77  QWIIC_RIGHT_ANGLE  [JST04_1MM_RA]  53.09,97.28 90 top
J78  QWIIC_RIGHT_ANGLE  [JST04_1MM_RA]  37.85,97.28 270 top
J79  [1X06_NO_SILK]  51.82,108.71 180 top
J80  [1X06_NO_SILK]  39.12,85.85 0 top
J81  QWIIC_RIGHT_ANGLE  [JST04_1MM_RA]  78.99,97.28 90 top
J82  QWIIC_RIGHT_ANGLE  [JST04_1MM_RA]  63.75,97.28 270 top
J83  [1X06_NO_SILK]  77.72,108.71 180 top
J84  [1X06_NO_SILK]  65.02,85.85 0 top
J85  QWIIC_RIGHT_ANGLE  [JST04_1MM_RA]  104.9,97.28 90 top
J86  QWIIC_RIGHT_ANGLE  [JST04_1MM_RA]  89.66,97.28 270 top
J87  [1X06_NO_SILK]  103.63,108.71 180 top
J88  [1X06_NO_SILK]  90.93,85.85 0 top
J89  QWIIC_RIGHT_ANGLE  [JST04_1MM_RA]  130.81,97.28 90 top
J90  QWIIC_RIGHT_ANGLE  [JST04_1MM_RA]  115.57,97.28 270 top
J91  [1X06_NO_SILK]  129.54,108.71 180 top
J92  [1X06_NO_SILK]  116.84,85.85 0 top
J93  QWIIC_RIGHT_ANGLE  [JST04_1MM_RA]  156.72,97.28 90 top
J94  QWIIC_RIGHT_ANGLE  [JST04_1MM_RA]  141.48,97.28 270 top
J95  [1X06_NO_SILK]  155.45,108.71 180 top
J96  [1X06_NO_SILK]  142.75,85.85 0 top
LOGO1  SFE_LOGO_NAME_FLAME.1_INCH  [SFE_LOGO_NAME_FLAME_.1]  19.56,21.59 0 bottom
LOGO2  QWIIC_LOGO_5MM  [QWIIC_5MM]  29.08,15.11 0 top
LOGO3  OSHW-LOGOS  [OSHW-LOGO-S]  10.03,14.48 0 top
LOGO4  SFE_LOGO_NAME_FLAME.1_INCH  [SFE_LOGO_NAME_FLAME_.1]  45.47,21.59 0 bottom
LOGO5  QWIIC_LOGO_5MM  [QWIIC_5MM]  54.99,15.11 0 top
LOGO6  OSHW-LOGOS  [OSHW-LOGO-S]  35.94,14.48 0 top
LOGO7  SFE_LOGO_NAME_FLAME.1_INCH  [SFE_LOGO_NAME_FLAME_.1]  71.37,21.59 0 bottom
LOGO8  QWIIC_LOGO_5MM  [QWIIC_5MM]  80.9,15.11 0 top
LOGO9  OSHW-LOGOS  [OSHW-LOGO-S]  61.85,14.48 0 top
LOGO10  SFE_LOGO_NAME_FLAME.1_INCH  [SFE_LOGO_NAME_FLAME_.1]  97.28,21.59 0 bottom
LOGO11  QWIIC_LOGO_5MM  [QWIIC_5MM]  106.81,15.11 0 top
LOGO12  OSHW-LOGOS  [OSHW-LOGO-S]  87.76,14.48 0 top
LOGO13  SFE_LOGO_NAME_FLAME.1_INCH  [SFE_LOGO_NAME_FLAME_.1]  123.19,21.59 0 bottom
LOGO14  QWIIC_LOGO_5MM  [QWIIC_5MM]  132.72,15.11 0 top
LOGO15  OSHW-LOGOS  [OSHW-LOGO-S]  113.67,14.48 0 top
LOGO16  SFE_LOGO_NAME_FLAME.1_INCH  [SFE_LOGO_NAME_FLAME_.1]  149.1,21.59 0 bottom
LOGO17  QWIIC_LOGO_5MM  [QWIIC_5MM]  158.62,15.11 0 top
LOGO18  OSHW-LOGOS  [OSHW-LOGO-S]  139.57,14.48 0 top
LOGO19  SFE_LOGO_NAME_FLAME.1_INCH  [SFE_LOGO_NAME_FLAME_.1]  19.56,47.5 0 bottom
LOGO20  QWIIC_LOGO_5MM  [QWIIC_5MM]  29.08,41.02 0 top
LOGO21  OSHW-LOGOS  [OSHW-LOGO-S]  10.03,40.39 0 top
LOGO22  SFE_LOGO_NAME_FLAME.1_INCH  [SFE_LOGO_NAME_FLAME_.1]  45.47,47.5 0 bottom
LOGO23  QWIIC_LOGO_5MM  [QWIIC_5MM]  54.99,41.02 0 top
LOGO24  OSHW-LOGOS  [OSHW-LOGO-S]  35.94,40.39 0 top
LOGO25  SFE_LOGO_NAME_FLAME.1_INCH  [SFE_LOGO_NAME_FLAME_.1]  71.37,47.5 0 bottom
LOGO26  QWIIC_LOGO_5MM  [QWIIC_5MM]  80.9,41.02 0 top
LOGO27  OSHW-LOGOS  [OSHW-LOGO-S]  61.85,40.39 0 top
LOGO28  SFE_LOGO_NAME_FLAME.1_INCH  [SFE_LOGO_NAME_FLAME_.1]  97.28,47.5 0 bottom
LOGO29  QWIIC_LOGO_5MM  [QWIIC_5MM]  106.81,41.02 0 top
LOGO30  OSHW-LOGOS  [OSHW-LOGO-S]  87.76,40.39 0 top
LOGO31  SFE_LOGO_NAME_FLAME.1_INCH  [SFE_LOGO_NAME_FLAME_.1]  123.19,47.5 0 bottom
LOGO32  QWIIC_LOGO_5MM  [QWIIC_5MM]  132.72,41.02 0 top
LOGO33  OSHW-LOGOS  [OSHW-LOGO-S]  113.67,40.39 0 top
LOGO34  SFE_LOGO_NAME_FLAME.1_INCH  [SFE_LOGO_NAME_FLAME_.1]  149.1,47.5 0 bottom
LOGO35  QWIIC_LOGO_5MM  [QWIIC_5MM]  158.62,41.02 0 top
LOGO36  OSHW-LOGOS  [OSHW-LOGO-S]  139.57,40.39 0 top
LOGO37  SFE_LOGO_NAME_FLAME.1_INCH  [SFE_LOGO_NAME_FLAME_.1]  19.56,73.41 0 bottom
LOGO38  QWIIC_LOGO_5MM  [QWIIC_5MM]  29.08,66.93 0 top
LOGO39  OSHW-LOGOS  [OSHW-LOGO-S]  10.03,66.29 0 top
LOGO40  SFE_LOGO_NAME_FLAME.1_INCH  [SFE_LOGO_NAME_FLAME_.1]  45.47,73.41 0 bottom
LOGO41  QWIIC_LOGO_5MM  [QWIIC_5MM]  54.99,66.93 0 top
LOGO42  OSHW-LOGOS  [OSHW-LOGO-S]  35.94,66.29 0 top
LOGO43  SFE_LOGO_NAME_FLAME.1_INCH  [SFE_LOGO_NAME_FLAME_.1]  71.37,73.41 0 bottom
LOGO44  QWIIC_LOGO_5MM  [QWIIC_5MM]  80.9,66.93 0 top
LOGO45  OSHW-LOGOS  [OSHW-LOGO-S]  61.85,66.29 0 top
LOGO46  SFE_LOGO_NAME_FLAME.1_INCH  [SFE_LOGO_NAME_FLAME_.1]  97.28,73.41 0 bottom
LOGO47  QWIIC_LOGO_5MM  [QWIIC_5MM]  106.81,66.93 0 top
LOGO48  OSHW-LOGOS  [OSHW-LOGO-S]  87.76,66.29 0 top
LOGO49  SFE_LOGO_NAME_FLAME.1_INCH  [SFE_LOGO_NAME_FLAME_.1]  123.19,73.41 0 bottom
LOGO50  QWIIC_LOGO_5MM  [QWIIC_5MM]  132.72,66.93 0 top
LOGO51  OSHW-LOGOS  [OSHW-LOGO-S]  113.67,66.29 0 top
LOGO52  SFE_LOGO_NAME_FLAME.1_INCH  [SFE_LOGO_NAME_FLAME_.1]  149.1,73.41 0 bottom
LOGO53  QWIIC_LOGO_5MM  [QWIIC_5MM]  158.62,66.93 0 top
LOGO54  OSHW-LOGOS  [OSHW-LOGO-S]  139.57,66.29 0 top
LOGO55  SFE_LOGO_NAME_FLAME.1_INCH  [SFE_LOGO_NAME_FLAME_.1]  19.56,99.31 0 bottom
LOGO56  QWIIC_LOGO_5MM  [QWIIC_5MM]  29.08,92.84 0 top
LOGO57  OSHW-LOGOS  [OSHW-LOGO-S]  10.03,92.2 0 top
LOGO58  SFE_LOGO_NAME_FLAME.1_INCH  [SFE_LOGO_NAME_FLAME_.1]  45.47,99.31 0 bottom
LOGO59  QWIIC_LOGO_5MM  [QWIIC_5MM]  54.99,92.84 0 top
LOGO60  OSHW-LOGOS  [OSHW-LOGO-S]  35.94,92.2 0 top
LOGO61  SFE_LOGO_NAME_FLAME.1_INCH  [SFE_LOGO_NAME_FLAME_.1]  71.37,99.31 0 bottom
LOGO62  QWIIC_LOGO_5MM  [QWIIC_5MM]  80.9,92.84 0 top
LOGO63  OSHW-LOGOS  [OSHW-LOGO-S]  61.85,92.2 0 top
LOGO64  SFE_LOGO_NAME_FLAME.1_INCH  [SFE_LOGO_NAME_FLAME_.1]  97.28,99.31 0 bottom
LOGO65  QWIIC_LOGO_5MM  [QWIIC_5MM]  106.81,92.84 0 top
LOGO66  OSHW-LOGOS  [OSHW-LOGO-S]  87.76,92.2 0 top
LOGO67  SFE_LOGO_NAME_FLAME.1_INCH  [SFE_LOGO_NAME_FLAME_.1]  123.19,99.31 0 bottom
LOGO68  QWIIC_LOGO_5MM  [QWIIC_5MM]  132.72,92.84 0 top
LOGO69  OSHW-LOGOS  [OSHW-LOGO-S]  113.67,92.2 0 top
LOGO70  SFE_LOGO_NAME_FLAME.1_INCH  [SFE_LOGO_NAME_FLAME_.1]  149.1,99.31 0 bottom
LOGO71  QWIIC_LOGO_5MM  [QWIIC_5MM]  158.62,92.84 0 top
LOGO72  OSHW-LOGOS  [OSHW-LOGO-S]  139.57,92.2 0 top
PWR  JUMPER-SMT_2_NC_TRACE_SILK  [SMT-JUMPER_2_NC_TRACE_SILK]  14.48,14.48 0 bottom
PWR1  JUMPER-SMT_2_NC_TRACE_SILK  [SMT-JUMPER_2_NC_TRACE_SILK]  40.39,14.48 0 bottom
PWR2  JUMPER-SMT_2_NC_TRACE_SILK  [SMT-JUMPER_2_NC_TRACE_SILK]  66.29,14.48 0 bottom
PWR3  JUMPER-SMT_2_NC_TRACE_SILK  [SMT-JUMPER_2_NC_TRACE_SILK]  92.2,14.48 0 bottom
PWR4  JUMPER-SMT_2_NC_TRACE_SILK  [SMT-JUMPER_2_NC_TRACE_SILK]  118.11,14.48 0 bottom
PWR5  JUMPER-SMT_2_NC_TRACE_SILK  [SMT-JUMPER_2_NC_TRACE_SILK]  144.02,14.48 0 bottom
PWR6  JUMPER-SMT_2_NC_TRACE_SILK  [SMT-JUMPER_2_NC_TRACE_SILK]  14.48,40.39 0 bottom
PWR7  JUMPER-SMT_2_NC_TRACE_SILK  [SMT-JUMPER_2_NC_TRACE_SILK]  40.39,40.39 0 bottom
PWR8  JUMPER-SMT_2_NC_TRACE_SILK  [SMT-JUMPER_2_NC_TRACE_SILK]  66.29,40.39 0 bottom
PWR9  JUMPER-SMT_2_NC_TRACE_SILK  [SMT-JUMPER_2_NC_TRACE_SILK]  92.2,40.39 0 bottom
PWR10  JUMPER-SMT_2_NC_TRACE_SILK  [SMT-JUMPER_2_NC_TRACE_SILK]  118.11,40.39 0 bottom
PWR11  JUMPER-SMT_2_NC_TRACE_SILK  [SMT-JUMPER_2_NC_TRACE_SILK]  144.02,40.39 0 bottom
PWR12  JUMPER-SMT_2_NC_TRACE_SILK  [SMT-JUMPER_2_NC_TRACE_SILK]  14.48,66.29 0 bottom
PWR13  JUMPER-SMT_2_NC_TRACE_SILK  [SMT-JUMPER_2_NC_TRACE_SILK]  40.39,66.29 0 bottom
PWR14  JUMPER-SMT_2_NC_TRACE_SILK  [SMT-JUMPER_2_NC_TRACE_SILK]  66.29,66.29 0 bottom
PWR15  JUMPER-SMT_2_NC_TRACE_SILK  [SMT-JUMPER_2_NC_TRACE_SILK]  92.2,66.29 0 bottom
PWR16  JUMPER-SMT_2_NC_TRACE_SILK  [SMT-JUMPER_2_NC_TRACE_SILK]  118.11,66.29 0 bottom
PWR17  JUMPER-SMT_2_NC_TRACE_SILK  [SMT-JUMPER_2_NC_TRACE_SILK]  144.02,66.29 0 bottom
PWR18  JUMPER-SMT_2_NC_TRACE_SILK  [SMT-JUMPER_2_NC_TRACE_SILK]  14.48,92.2 0 bottom
PWR19  JUMPER-SMT_2_NC_TRACE_SILK  [SMT-JUMPER_2_NC_TRACE_SILK]  40.39,92.2 0 bottom
PWR20  JUMPER-SMT_2_NC_TRACE_SILK  [SMT-JUMPER_2_NC_TRACE_SILK]  66.29,92.2 0 bottom
PWR21  JUMPER-SMT_2_NC_TRACE_SILK  [SMT-JUMPER_2_NC_TRACE_SILK]  92.2,92.2 0 bottom
PWR22  JUMPER-SMT_2_NC_TRACE_SILK  [SMT-JUMPER_2_NC_TRACE_SILK]  118.11,92.2 0 bottom
PWR23  JUMPER-SMT_2_NC_TRACE_SILK  [SMT-JUMPER_2_NC_TRACE_SILK]  144.02,92.2 0 bottom
R1  2.2k  [0603]  20.83,14.48 270 top
R2  2.2k  [0603]  18.29,14.48 270 top
R3  100k  [0603]  25.91,14.48 270 top
R4  4.7k  [0603]  15.75,14.48 90 top
R5  100k  [0603]  23.37,14.48 90 top
R6  100k  [0603]  23.37,19.56 270 top
R7  2.2k  [0603]  46.74,14.48 270 top
R8  2.2k  [0603]  44.2,14.48 270 top
R9  100k  [0603]  51.82,14.48 270 top
R10  4.7k  [0603]  41.66,14.48 90 top
R11  100k  [0603]  49.28,14.48 90 top
R12  100k  [0603]  49.28,19.56 270 top
R13  2.2k  [0603]  72.64,14.48 270 top
R14  2.2k  [0603]  70.1,14.48 270 top
R15  100k  [0603]  77.72,14.48 270 top
R16  4.7k  [0603]  67.56,14.48 90 top
R17  100k  [0603]  75.18,14.48 90 top
R18  100k  [0603]  75.18,19.56 270 top
R19  2.2k  [0603]  98.55,14.48 270 top
R20  2.2k  [0603]  96.01,14.48 270 top
R21  100k  [0603]  103.63,14.48 270 top
R22  4.7k  [0603]  93.47,14.48 90 top
R23  100k  [0603]  101.09,14.48 90 top
R24  100k  [0603]  101.09,19.56 270 top
R25  2.2k  [0603]  124.46,14.48 270 top
R26  2.2k  [0603]  121.92,14.48 270 top
R27  100k  [0603]  129.54,14.48 270 top
R28  4.7k  [0603]  119.38,14.48 90 top
R29  100k  [0603]  127,14.48 90 top
R30  100k  [0603]  127,19.56 270 top
R31  2.2k  [0603]  150.37,14.48 270 top
R32  2.2k  [0603]  147.83,14.48 270 top
R33  100k  [0603]  155.45,14.48 270 top
R34  4.7k  [0603]  145.29,14.48 90 top
R35  100k  [0603]  152.91,14.48 90 top
R36  100k  [0603]  152.91,19.56 270 top
R37  2.2k  [0603]  20.83,40.39 270 top
R38  2.2k  [0603]  18.29,40.39 270 top
R39  100k  [0603]  25.91,40.39 270 top
R40  4.7k  [0603]  15.75,40.39 90 top
R41  100k  [0603]  23.37,40.39 90 top
R42  100k  [0603]  23.37,45.47 270 top
R43  2.2k  [0603]  46.74,40.39 270 top
R44  2.2k  [0603]  44.2,40.39 270 top
R45  100k  [0603]  51.82,40.39 270 top
R46  4.7k  [0603]  41.66,40.39 90 top
R47  100k  [0603]  49.28,40.39 90 top
R48  100k  [0603]  49.28,45.47 270 top
R49  2.2k  [0603]  72.64,40.39 270 top
R50  2.2k  [0603]  70.1,40.39 270 top
R51  100k  [0603]  77.72,40.39 270 top
R52  4.7k  [0603]  67.56,40.39 90 top
R53  100k  [0603]  75.18,40.39 90 top
R54  100k  [0603]  75.18,45.47 270 top
R55  2.2k  [0603]  98.55,40.39 270 top
R56  2.2k  [0603]  96.01,40.39 270 top
R57  100k  [0603]  103.63,40.39 270 top
R58  4.7k  [0603]  93.47,40.39 90 top
R59  100k  [0603]  101.09,40.39 90 top
R60  100k  [0603]  101.09,45.47 270 top
R61  2.2k  [0603]  124.46,40.39 270 top
R62  2.2k  [0603]  121.92,40.39 270 top
R63  100k  [0603]  129.54,40.39 270 top
R64  4.7k  [0603]  119.38,40.39 90 top
R65  100k  [0603]  127,40.39 90 top
R66  100k  [0603]  127,45.47 270 top
R67  2.2k  [0603]  150.37,40.39 270 top
R68  2.2k  [0603]  147.83,40.39 270 top
R69  100k  [0603]  155.45,40.39 270 top
R70  4.7k  [0603]  145.29,40.39 90 top
R71  100k  [0603]  152.91,40.39 90 top
R72  100k  [0603]  152.91,45.47 270 top
R73  2.2k  [0603]  20.83,66.29 270 top
R74  2.2k  [0603]  18.29,66.29 270 top
R75  100k  [0603]  25.91,66.29 270 top
R76  4.7k  [0603]  15.75,66.29 90 top
R77  100k  [0603]  23.37,66.29 90 top
R78  100k  [0603]  23.37,71.37 270 top
R79  2.2k  [0603]  46.74,66.29 270 top
R80  2.2k  [0603]  44.2,66.29 270 top
R81  100k  [0603]  51.82,66.29 270 top
R82  4.7k  [0603]  41.66,66.29 90 top
R83  100k  [0603]  49.28,66.29 90 top
R84  100k  [0603]  49.28,71.37 270 top
R85  2.2k  [0603]  72.64,66.29 270 top
R86  2.2k  [0603]  70.1,66.29 270 top
R87  100k  [0603]  77.72,66.29 270 top
R88  4.7k  [0603]  67.56,66.29 90 top
R89  100k  [0603]  75.18,66.29 90 top
R90  100k  [0603]  75.18,71.37 270 top
R91  2.2k  [0603]  98.55,66.29 270 top
R92  2.2k  [0603]  96.01,66.29 270 top
R93  100k  [0603]  103.63,66.29 270 top
R94  4.7k  [0603]  93.47,66.29 90 top
R95  100k  [0603]  101.09,66.29 90 top
R96  100k  [0603]  101.09,71.37 270 top
R97  2.2k  [0603]  124.46,66.29 270 top
R98  2.2k  [0603]  121.92,66.29 270 top
R99  100k  [0603]  129.54,66.29 270 top
R100  4.7k  [0603]  119.38,66.29 90 top
R101  100k  [0603]  127,66.29 90 top
R102  100k  [0603]  127,71.37 270 top
R103  2.2k  [0603]  150.37,66.29 270 top
R104  2.2k  [0603]  147.83,66.29 270 top
R105  100k  [0603]  155.45,66.29 270 top
R106  4.7k  [0603]  145.29,66.29 90 top
R107  100k  [0603]  152.91,66.29 90 top
R108  100k  [0603]  152.91,71.37 270 top
R109  2.2k  [0603]  20.83,92.2 270 top
R110  2.2k  [0603]  18.29,92.2 270 top
R111  100k  [0603]  25.91,92.2 270 top
R112  4.7k  [0603]  15.75,92.2 90 top
R113  100k  [0603]  23.37,92.2 90 top
R114  100k  [0603]  23.37,97.28 270 top
R115  2.2k  [0603]  46.74,92.2 270 top
R116  2.2k  [0603]  44.2,92.2 270 top
R117  100k  [0603]  51.82,92.2 270 top
R118  4.7k  [0603]  41.66,92.2 90 top
R119  100k  [0603]  49.28,92.2 90 top
R120  100k  [0603]  49.28,97.28 270 top
R121  2.2k  [0603]  72.64,92.2 270 top
R122  2.2k  [0603]  70.1,92.2 270 top
R123  100k  [0603]  77.72,92.2 270 top
R124  4.7k  [0603]  67.56,92.2 90 top
R125  100k  [0603]  75.18,92.2 90 top
R126  100k  [0603]  75.18,97.28 270 top
R127  2.2k  [0603]  98.55,92.2 270 top
R128  2.2k  [0603]  96.01,92.2 270 top
R129  100k  [0603]  103.63,92.2 270 top
R130  4.7k  [0603]  93.47,92.2 90 top
R131  100k  [0603]  101.09,92.2 90 top
R132  100k  [0603]  101.09,97.28 270 top
R133  2.2k  [0603]  124.46,92.2 270 top
R134  2.2k  [0603]  121.92,92.2 270 top
R135  100k  [0603]  129.54,92.2 270 top
R136  4.7k  [0603]  119.38,92.2 90 top
R137  100k  [0603]  127,92.2 90 top
R138  100k  [0603]  127,97.28 270 top
R139  2.2k  [0603]  150.37,92.2 270 top
R140  2.2k  [0603]  147.83,92.2 270 top
R141  100k  [0603]  155.45,92.2 270 top
R142  4.7k  [0603]  145.29,92.2 90 top
R143  100k  [0603]  152.91,92.2 90 top
R144  100k  [0603]  152.91,97.28 270 top
U1  BMI270  [BMI270]  19.56,19.56 180 top
U2  BMI270  [BMI270]  45.47,19.56 180 top
U3  BMI270  [BMI270]  71.37,19.56 180 top
U4  BMI270  [BMI270]  97.28,19.56 180 top
U5  BMI270  [BMI270]  123.19,19.56 180 top
U6  BMI270  [BMI270]  149.1,19.56 180 top
U7  BMI270  [BMI270]  19.56,45.47 180 top
U8  BMI270  [BMI270]  45.47,45.47 180 top
U9  BMI270  [BMI270]  71.37,45.47 180 top
U10  BMI270  [BMI270]  97.28,45.47 180 top
U11  BMI270  [BMI270]  123.19,45.47 180 top
U12  BMI270  [BMI270]  149.1,45.47 180 top
U13  BMI270  [BMI270]  19.56,71.37 180 top
U14  BMI270  [BMI270]  45.47,71.37 180 top
U15  BMI270  [BMI270]  71.37,71.37 180 top
U16  BMI270  [BMI270]  97.28,71.37 180 top
U17  BMI270  [BMI270]  123.19,71.37 180 top
U18  BMI270  [BMI270]  149.1,71.37 180 top
U19  BMI270  [BMI270]  19.56,97.28 180 top
U20  BMI270  [BMI270]  45.47,97.28 180 top
U21  BMI270  [BMI270]  71.37,97.28 180 top
U22  BMI270  [BMI270]  97.28,97.28 180 top
U23  BMI270  [BMI270]  123.19,97.28 180 top
U24  BMI270  [BMI270]  149.1,97.28 180 top
U$1  [#I2C#0]  19.56,16.13 0 bottom
U$2  [#_SDA#0]  18.29,8.38 90 top
U$3  [SFE_LOGO_FLAME_.2]  28.7,25.27 0 top
U$4  [#PWR#0]  14.48,16.13 0 bottom
U$5  [#ADR#0]  26.04,14.48 0 bottom
U$6  [#0X68#0]  25.53,15.11 90 bottom
U$7  [#_3V3#0]  15.75,8.38 90 top
U$8  [#_#CS##0]  25.91,8.38 90 top
U$9  [#_ADR#0]  23.37,8.38 90 top
U$10  [#_SCL#0]  20.83,8.38 90 top
U$11  [#ASDX_#0]  25.91,30.86 90 top
U$12  [#_GND#0]  13.21,8.38 90 bottom
U$13  [#_3V3#0]  15.75,8.38 90 bottom
U$14  [#_SDA#0]  18.29,8.38 90 bottom
U$15  [#_SCL#0]  20.83,8.38 90 bottom
U$16  [#_ADR#0]  23.37,8.38 90 bottom
U$17  [#_#CS##0]  25.91,8.38 90 bottom
U$18  [#0X69#0]  23.75,15.11 90 bottom
U$19  [#_GND#0]  13.21,8.38 90 top
U$20  [BMI2700]  19.56,18.92 0 bottom
U$21  [BMI2700]  19.56,24 0 top
U$22  [#ASCX_#0]  23.37,30.86 90 top
U$23  [#INT1_#0]  20.83,30.86 90 top
U$24  [#INT2_#0]  18.29,30.86 90 top
U$25  [##OCS#_#0]  15.75,30.86 90 top
U$26  [#OSDO_#0]  13.21,30.86 90 top
U$27  [#ASDX_#0]  25.91,30.86 90 bottom
U$28  [#ASCX_#0]  23.37,30.86 90 bottom
U$29  [#INT1_#0]  20.83,30.86 90 bottom
U$30  [#INT2_#0]  18.29,30.86 90 bottom
U$31  [##OCS#_#0]  15.75,30.86 90 bottom
U$32  [#OSDO_#0]  13.21,30.86 90 bottom
U$33  [X0]  34.42,26.04 0 top
U$34  [PWR0]  14.48,14.48 90 top
U$35  [Y0]  35.43,27.18 0 top
U$36  [Z0]  38.48,23.62 0 top
U$37  [SFE_LOGO_FLAME_.2]  54.61,25.27 0 top
U$38  [#I2C#0]  45.47,16.13 0 bottom
U$39  [#PWR#0]  40.39,16.13 0 bottom
U$40  [#ADR#0]  51.94,14.48 0 bottom
U$41  [#0X68#0]  51.43,15.11 90 bottom
U$42  [#0X69#0]  49.66,15.11 90 bottom
U$43  [BMI2700]  45.47,18.92 0 bottom
U$44  [BMI2700]  45.47,24 0 top
U$45  [#_GND#0]  39.12,8.38 90 top
U$46  [#_3V3#0]  41.66,8.38 90 top
U$47  [#_SDA#0]  44.2,8.38 90 top
U$48  [#_SCL#0]  46.74,8.38 90 top
U$49  [#_ADR#0]  49.28,8.38 90 top
U$50  [#_#CS##0]  51.82,8.38 90 top
U$51  [#ASDX_#0]  51.82,30.86 90 top
U$52  [#ASCX_#0]  49.28,30.86 90 top
U$53  [#INT1_#0]  46.74,30.86 90 top
U$54  [#INT2_#0]  44.2,30.86 90 top
U$55  [##OCS#_#0]  41.66,30.86 90 top
U$56  [#OSDO_#0]  39.12,30.86 90 top
U$57  [#_GND#0]  39.12,8.38 90 bottom
U$58  [#_3V3#0]  41.66,8.38 90 bottom
U$59  [#_SDA#0]  44.2,8.38 90 bottom
U$60  [#_SCL#0]  46.74,8.38 90 bottom
U$61  [#_ADR#0]  49.28,8.38 90 bottom
U$62  [#_#CS##0]  51.82,8.38 90 bottom
U$63  [#ASDX_#0]  51.82,30.86 90 bottom
U$64  [#ASCX_#0]  49.28,30.86 90 bottom
U$65  [#INT1_#0]  46.74,30.86 90 bottom
U$66  [#INT2_#0]  44.2,30.86 90 bottom
U$67  [##OCS#_#0]  41.66,30.86 90 bottom
U$68  [#OSDO_#0]  39.12,30.86 90 bottom
U$69  [X0]  34.04,24.77 0 bottom
U$70  [Y0]  35.31,25.91 0 bottom
U$71  [Z0]  38.35,22.35 0 bottom
U$72  [PWR0]  40.39,14.48 90 top
U$73  [X0]  60.32,26.04 0 top
U$74  [Y0]  61.34,27.18 0 top
U$75  [Z0]  64.39,23.62 0 top
U$76  [SFE_LOGO_FLAME_.2]  80.52,25.27 0 top
U$77  [#I2C#0]  71.37,16.13 0 bottom
U$78  [#PWR#0]  66.29,16.13 0 bottom
U$79  [X0]  8.13,24.77 0 bottom
U$80  [Y0]  9.4,25.91 0 bottom
U$81  [Z0]  12.45,22.35 0 bottom
U$82  [#ADR#0]  77.85,14.48 0 bottom
U$83  [#0X68#0]  77.34,15.11 90 bottom
U$84  [#0X69#0]  75.56,15.11 90 bottom
U$85  [BMI2700]  71.37,18.92 0 bottom
U$86  [BMI2700]  71.37,24 0 top
U$87  [#_GND#0]  65.02,8.38 90 top
U$88  [X0]  8.51,26.04 0 top
U$89  [Y0]  9.52,27.18 0 top
U$90  [Z0]  12.57,23.62 0 top
U$91  [#_3V3#0]  67.56,8.38 90 top
U$92  [#_SDA#0]  70.1,8.38 90 top
U$93  [#_SCL#0]  72.64,8.38 90 top
U$94  [#_ADR#0]  75.18,8.38 90 top
U$95  [#_#CS##0]  77.72,8.38 90 top
U$96  [#ASDX_#0]  77.72,30.86 90 top
U$97  [#ASCX_#0]  75.18,30.86 90 top
U$98  [#INT1_#0]  72.64,30.86 90 top
U$99  [#INT2_#0]  70.1,30.86 90 top
U$100  [##OCS#_#0]  67.56,30.86 90 top
U$101  [#OSDO_#0]  65.02,30.86 90 top
U$102  [#_GND#0]  65.02,8.38 90 bottom
U$103  [#_3V3#0]  67.56,8.38 90 bottom
U$104  [#_SDA#0]  70.1,8.38 90 bottom
U$105  [#_SCL#0]  72.64,8.38 90 bottom
U$106  [#_ADR#0]  75.18,8.38 90 bottom
U$107  [#_#CS##0]  77.72,8.38 90 bottom
U$108  [#ASDX_#0]  77.72,30.86 90 bottom
U$109  [#ASCX_#0]  75.18,30.86 90 bottom
U$110  [#INT1_#0]  72.64,30.86 90 bottom
U$111  [#INT2_#0]  70.1,30.86 90 bottom
U$112  [##OCS#_#0]  67.56,30.86 90 bottom
U$113  [#OSDO_#0]  65.02,30.86 90 bottom
U$114  [X0]  59.94,24.77 0 bottom
U$115  [Y0]  61.21,25.91 0 bottom
U$116  [Z0]  64.26,22.35 0 bottom
U$117  [PWR0]  66.29,14.48 90 top
U$118  [X0]  86.23,26.04 0 top
U$119  [Y0]  87.25,27.18 0 top
U$120  [Z0]  90.3,23.62 0 top
U$121  [SFE_LOGO_FLAME_.2]  106.43,25.27 0 top
U$122  [#I2C#0]  97.28,16.13 0 bottom
U$123  [#PWR#0]  92.2,16.13 0 bottom
U$124  [#ADR#0]  103.76,14.48 0 bottom
U$125  [#0X68#0]  103.25,15.11 90 bottom
U$126  [#0X69#0]  101.47,15.11 90 bottom
U$127  [BMI2700]  97.28,18.92 0 bottom
U$128  [BMI2700]  97.28,24 0 top
U$129  [#_GND#0]  90.93,8.38 90 top
U$130  [#_3V3#0]  93.47,8.38 90 top
U$131  [#_SDA#0]  96.01,8.38 90 top
U$132  [#_SCL#0]  98.55,8.38 90 top
U$133  [#_ADR#0]  101.09,8.38 90 top
U$134  [#_#CS##0]  103.63,8.38 90 top
U$135  [#ASDX_#0]  103.63,30.86 90 top
U$136  [#ASCX_#0]  101.09,30.86 90 top
U$137  [#INT1_#0]  98.55,30.86 90 top
U$138  [#INT2_#0]  96.01,30.86 90 top
U$139  [##OCS#_#0]  93.47,30.86 90 top
U$140  [#OSDO_#0]  90.93,30.86 90 top
U$141  [#_GND#0]  90.93,8.38 90 bottom
U$142  [#_3V3#0]  93.47,8.38 90 bottom
U$143  [#_SDA#0]  96.01,8.38 90 bottom
U$144  [#_SCL#0]  98.55,8.38 90 bottom
U$145  [#_ADR#0]  101.09,8.38 90 bottom
U$146  [#_#CS##0]  103.63,8.38 90 bottom
U$147  [#ASDX_#0]  103.63,30.86 90 bottom
U$148  [#ASCX_#0]  101.09,30.86 90 bottom
U$149  [#INT1_#0]  98.55,30.86 90 bottom
U$150  [#INT2_#0]  96.01,30.86 90 bottom
U$151  [##OCS#_#0]  93.47,30.86 90 bottom
U$152  [#OSDO_#0]  90.93,30.86 90 bottom
U$153  [X0]  85.85,24.77 0 bottom
U$154  [Y0]  87.12,25.91 0 bottom
U$155  [Z0]  90.17,22.35 0 bottom
U$156  [PWR0]  92.2,14.48 90 top
U$157  [X0]  112.14,26.04 0 top
U$158  [Y0]  113.16,27.18 0 top
U$159  [Z0]  116.2,23.62 0 top
U$160  [SFE_LOGO_FLAME_.2]  132.33,25.27 0 top
U$161  [#I2C#0]  123.19,16.13 0 bottom
U$162  [#PWR#0]  118.11,16.13 0 bottom
U$163  [#ADR#0]  129.67,14.48 0 bottom
U$164  [#0X68#0]  129.16,15.11 90 bottom
U$165  [#0X69#0]  127.38,15.11 90 bottom
U$166  [BMI2700]  123.19,18.92 0 bottom
U$167  [BMI2700]  123.19,24 0 top
U$168  [#_GND#0]  116.84,8.38 90 top
U$169  [#_3V3#0]  119.38,8.38 90 top
U$170  [#_SDA#0]  121.92,8.38 90 top
U$171  [#_SCL#0]  124.46,8.38 90 top
U$172  [#_ADR#0]  127,8.38 90 top
U$173  [#_#CS##0]  129.54,8.38 90 top
U$174  [#ASDX_#0]  129.54,30.86 90 top
U$175  [#ASCX_#0]  127,30.86 90 top
U$176  [#INT1_#0]  124.46,30.86 90 top
U$177  [#INT2_#0]  121.92,30.86 90 top
U$178  [##OCS#_#0]  119.38,30.86 90 top
U$179  [#OSDO_#0]  116.84,30.86 90 top
U$180  [#_GND#0]  116.84,8.38 90 bottom
U$181  [#_3V3#0]  119.38,8.38 90 bottom
U$182  [#_SDA#0]  121.92,8.38 90 bottom
U$183  [#_SCL#0]  124.46,8.38 90 bottom
U$184  [#_ADR#0]  127,8.38 90 bottom
U$185  [#_#CS##0]  129.54,8.38 90 bottom
U$186  [#ASDX_#0]  129.54,30.86 90 bottom
U$187  [#ASCX_#0]  127,30.86 90 bottom
U$188  [#INT1_#0]  124.46,30.86 90 bottom
U$189  [#INT2_#0]  121.92,30.86 90 bottom
U$190  [##OCS#_#0]  119.38,30.86 90 bottom
U$191  [#OSDO_#0]  116.84,30.86 90 bottom
U$192  [X0]  111.76,24.77 0 bottom
U$193  [Y0]  113.03,25.91 0 bottom
U$194  [Z0]  116.08,22.35 0 bottom
U$195  [PWR0]  118.11,14.48 90 top
U$196  [X0]  138.05,26.04 0 top
U$197  [Y0]  139.06,27.18 0 top
U$198  [Z0]  142.11,23.62 0 top
U$199  [SFE_LOGO_FLAME_.2]  158.24,25.27 0 top
U$200  [#I2C#0]  149.1,16.13 0 bottom
U$201  [#PWR#0]  144.02,16.13 0 bottom
U$202  [#ADR#0]  155.58,14.48 0 bottom
U$203  [#0X68#0]  155.07,15.11 90 bottom
U$204  [#0X69#0]  153.29,15.11 90 bottom
U$205  [BMI2700]  149.1,18.92 0 bottom
U$206  [BMI2700]  149.1,24 0 top
U$207  [#_GND#0]  142.75,8.38 90 top
U$208  [#_3V3#0]  145.29,8.38 90 top
U$209  [#_SDA#0]  147.83,8.38 90 top
U$210  [#_SCL#0]  150.37,8.38 90 top
U$211  [#_ADR#0]  152.91,8.38 90 top
U$212  [#_#CS##0]  155.45,8.38 90 top
U$213  [#ASDX_#0]  155.45,30.86 90 top
U$214  [#ASCX_#0]  152.91,30.86 90 top
U$215  [#INT1_#0]  150.37,30.86 90 top
U$216  [#INT2_#0]  147.83,30.86 90 top
U$217  [##OCS#_#0]  145.29,30.86 90 top
U$218  [#OSDO_#0]  142.75,30.86 90 top
U$219  [#_GND#0]  142.75,8.38 90 bottom
U$220  [#_3V3#0]  145.29,8.38 90 bottom
U$221  [#_SDA#0]  147.83,8.38 90 bottom
U$222  [#_SCL#0]  150.37,8.38 90 bottom
U$223  [#_ADR#0]  152.91,8.38 90 bottom
U$224  [#_#CS##0]  155.45,8.38 90 bottom
U$225  [#ASDX_#0]  155.45,30.86 90 bottom
U$226  [#ASCX_#0]  152.91,30.86 90 bottom
U$227  [#INT1_#0]  150.37,30.86 90 bottom
U$228  [#INT2_#0]  147.83,30.86 90 bottom
U$229  [##OCS#_#0]  145.29,30.86 90 bottom
U$230  [#OSDO_#0]  142.75,30.86 90 bottom
U$231  [X0]  137.67,24.77 0 bottom
U$232  [Y0]  138.94,25.91 0 bottom
U$233  [Z0]  141.99,22.35 0 bottom
U$234  [PWR0]  144.02,14.48 90 top
U$235  [X0]  8.51,51.94 0 top
U$236  [Y0]  9.52,53.09 0 top
U$237  [Z0]  12.57,49.53 0 top
U$238  [SFE_LOGO_FLAME_.2]  28.7,51.18 0 top
U$239  [#I2C#0]  19.56,42.04 0 bottom
U$240  [#PWR#0]  14.48,42.04 0 bottom
U$241  [#ADR#0]  26.04,40.39 0 bottom
U$242  [#0X68#0]  25.53,41.02 90 bottom
U$243  [#0X69#0]  23.75,41.02 90 bottom
U$244  [BMI2700]  19.56,44.83 0 bottom
U$245  [BMI2700]  19.56,49.91 0 top
U$246  [#_GND#0]  13.21,34.29 90 top
U$247  [#_3V3#0]  15.75,34.29 90 top
U$248  [#_SDA#0]  18.29,34.29 90 top
U$249  [#_SCL#0]  20.83,34.29 90 top
U$250  [#_ADR#0]  23.37,34.29 90 top
U$251  [#_#CS##0]  25.91,34.29 90 top
U$252  [#ASDX_#0]  25.91,56.77 90 top
U$253  [#ASCX_#0]  23.37,56.77 90 top
U$254  [#INT1_#0]  20.83,56.77 90 top
U$255  [#INT2_#0]  18.29,56.77 90 top
U$256  [##OCS#_#0]  15.75,56.77 90 top
U$257  [#OSDO_#0]  13.21,56.77 90 top
U$258  [#_GND#0]  13.21,34.29 90 bottom
U$259  [#_3V3#0]  15.75,34.29 90 bottom
U$260  [#_SDA#0]  18.29,34.29 90 bottom
U$261  [#_SCL#0]  20.83,34.29 90 bottom
U$262  [#_ADR#0]  23.37,34.29 90 bottom
U$263  [#_#CS##0]  25.91,34.29 90 bottom
U$264  [#ASDX_#0]  25.91,56.77 90 bottom
U$265  [#ASCX_#0]  23.37,56.77 90 bottom
U$266  [#INT1_#0]  20.83,56.77 90 bottom
U$267  [#INT2_#0]  18.29,56.77 90 bottom
U$268  [##OCS#_#0]  15.75,56.77 90 bottom
U$269  [#OSDO_#0]  13.21,56.77 90 bottom
U$270  [X0]  8.13,50.67 0 bottom
U$271  [Y0]  9.4,51.82 0 bottom
U$272  [Z0]  12.45,48.26 0 bottom
U$273  [PWR0]  14.48,40.39 90 top
U$274  [X0]  34.42,51.94 0 top
U$275  [Y0]  35.43,53.09 0 top
U$276  [Z0]  38.48,49.53 0 top
U$277  [SFE_LOGO_FLAME_.2]  54.61,51.18 0 top
U$278  [#I2C#0]  45.47,42.04 0 bottom
U$279  [#PWR#0]  40.39,42.04 0 bottom
U$280  [#ADR#0]  51.94,40.39 0 bottom
U$281  [#0X68#0]  51.43,41.02 90 bottom
U$282  [#0X69#0]  49.66,41.02 90 bottom
U$283  [BMI2700]  45.47,44.83 0 bottom
U$284  [BMI2700]  45.47,49.91 0 top
U$285  [#_GND#0]  39.12,34.29 90 top
U$286  [#_3V3#0]  41.66,34.29 90 top
U$287  [#_SDA#0]  44.2,34.29 90 top
U$288  [#_SCL#0]  46.74,34.29 90 top
U$289  [#_ADR#0]  49.28,34.29 90 top
U$290  [#_#CS##0]  51.82,34.29 90 top
U$291  [#ASDX_#0]  51.82,56.77 90 top
U$292  [#ASCX_#0]  49.28,56.77 90 top
U$293  [#INT1_#0]  46.74,56.77 90 top
U$294  [#INT2_#0]  44.2,56.77 90 top
U$295  [##OCS#_#0]  41.66,56.77 90 top
U$296  [#OSDO_#0]  39.12,56.77 90 top
U$297  [#_GND#0]  39.12,34.29 90 bottom
U$298  [#_3V3#0]  41.66,34.29 90 bottom
U$299  [#_SDA#0]  44.2,34.29 90 bottom
U$300  [#_SCL#0]  46.74,34.29 90 bottom
U$301  [#_ADR#0]  49.28,34.29 90 bottom
U$302  [#_#CS##0]  51.82,34.29 90 bottom
U$303  [#ASDX_#0]  51.82,56.77 90 bottom
U$304  [#ASCX_#0]  49.28,56.77 90 bottom
U$305  [#INT1_#0]  46.74,56.77 90 bottom
U$306  [#INT2_#0]  44.2,56.77 90 bottom
U$307  [##OCS#_#0]  41.66,56.77 90 bottom
U$308  [#OSDO_#0]  39.12,56.77 90 bottom
U$309  [X0]  34.04,50.67 0 bottom
U$310  [Y0]  35.31,51.82 0 bottom
U$311  [Z0]  38.35,48.26 0 bottom
U$312  [PWR0]  40.39,40.39 90 top
U$313  [X0]  60.32,51.94 0 top
U$314  [Y0]  61.34,53.09 0 top
U$315  [Z0]  64.39,49.53 0 top
U$316  [SFE_LOGO_FLAME_.2]  80.52,51.18 0 top
U$317  [#I2C#0]  71.37,42.04 0 bottom
U$318  [#PWR#0]  66.29,42.04 0 bottom
U$319  [#ADR#0]  77.85,40.39 0 bottom
U$320  [#0X68#0]  77.34,41.02 90 bottom
U$321  [#0X69#0]  75.56,41.02 90 bottom
U$322  [BMI2700]  71.37,44.83 0 bottom
U$323  [BMI2700]  71.37,49.91 0 top
U$324  [#_GND#0]  65.02,34.29 90 top
U$325  [#_3V3#0]  67.56,34.29 90 top
U$326  [#_SDA#0]  70.1,34.29 90 top
U$327  [#_SCL#0]  72.64,34.29 90 top
U$328  [#_ADR#0]  75.18,34.29 90 top
U$329  [#_#CS##0]  77.72,34.29 90 top
U$330  [#ASDX_#0]  77.72,56.77 90 top
U$331  [#ASCX_#0]  75.18,56.77 90 top